# EAGLE board IOXGDv0.4.1 Panel (EAGLE 9.5.0), part 1 of 3
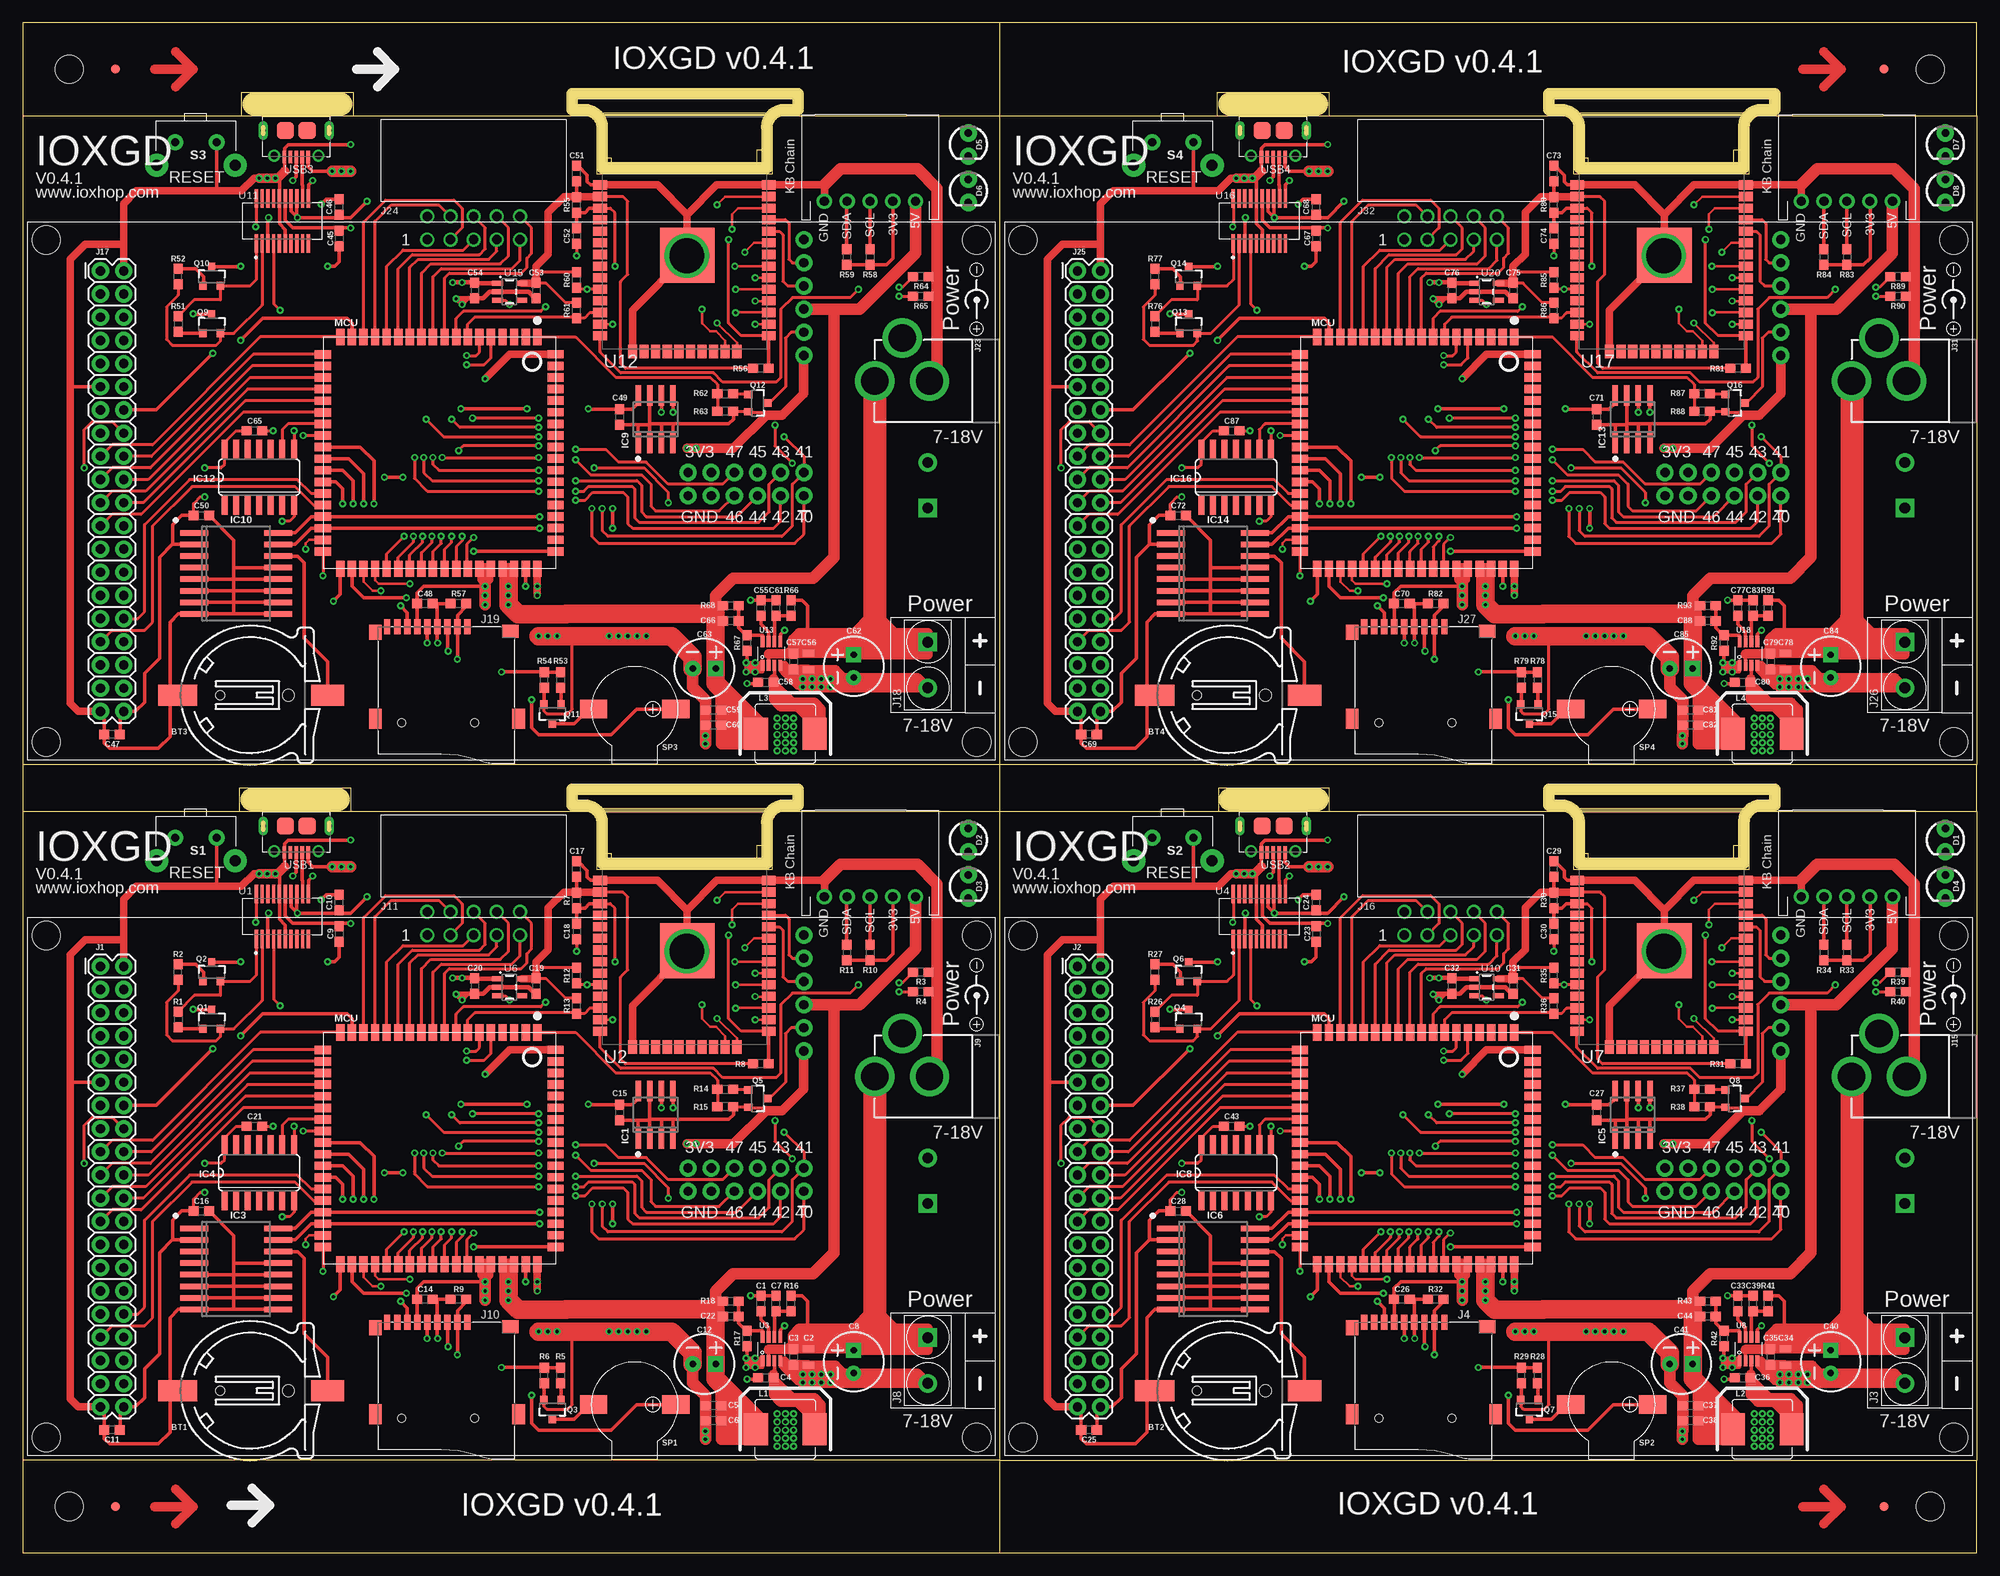
[diagram p0: board, top side]
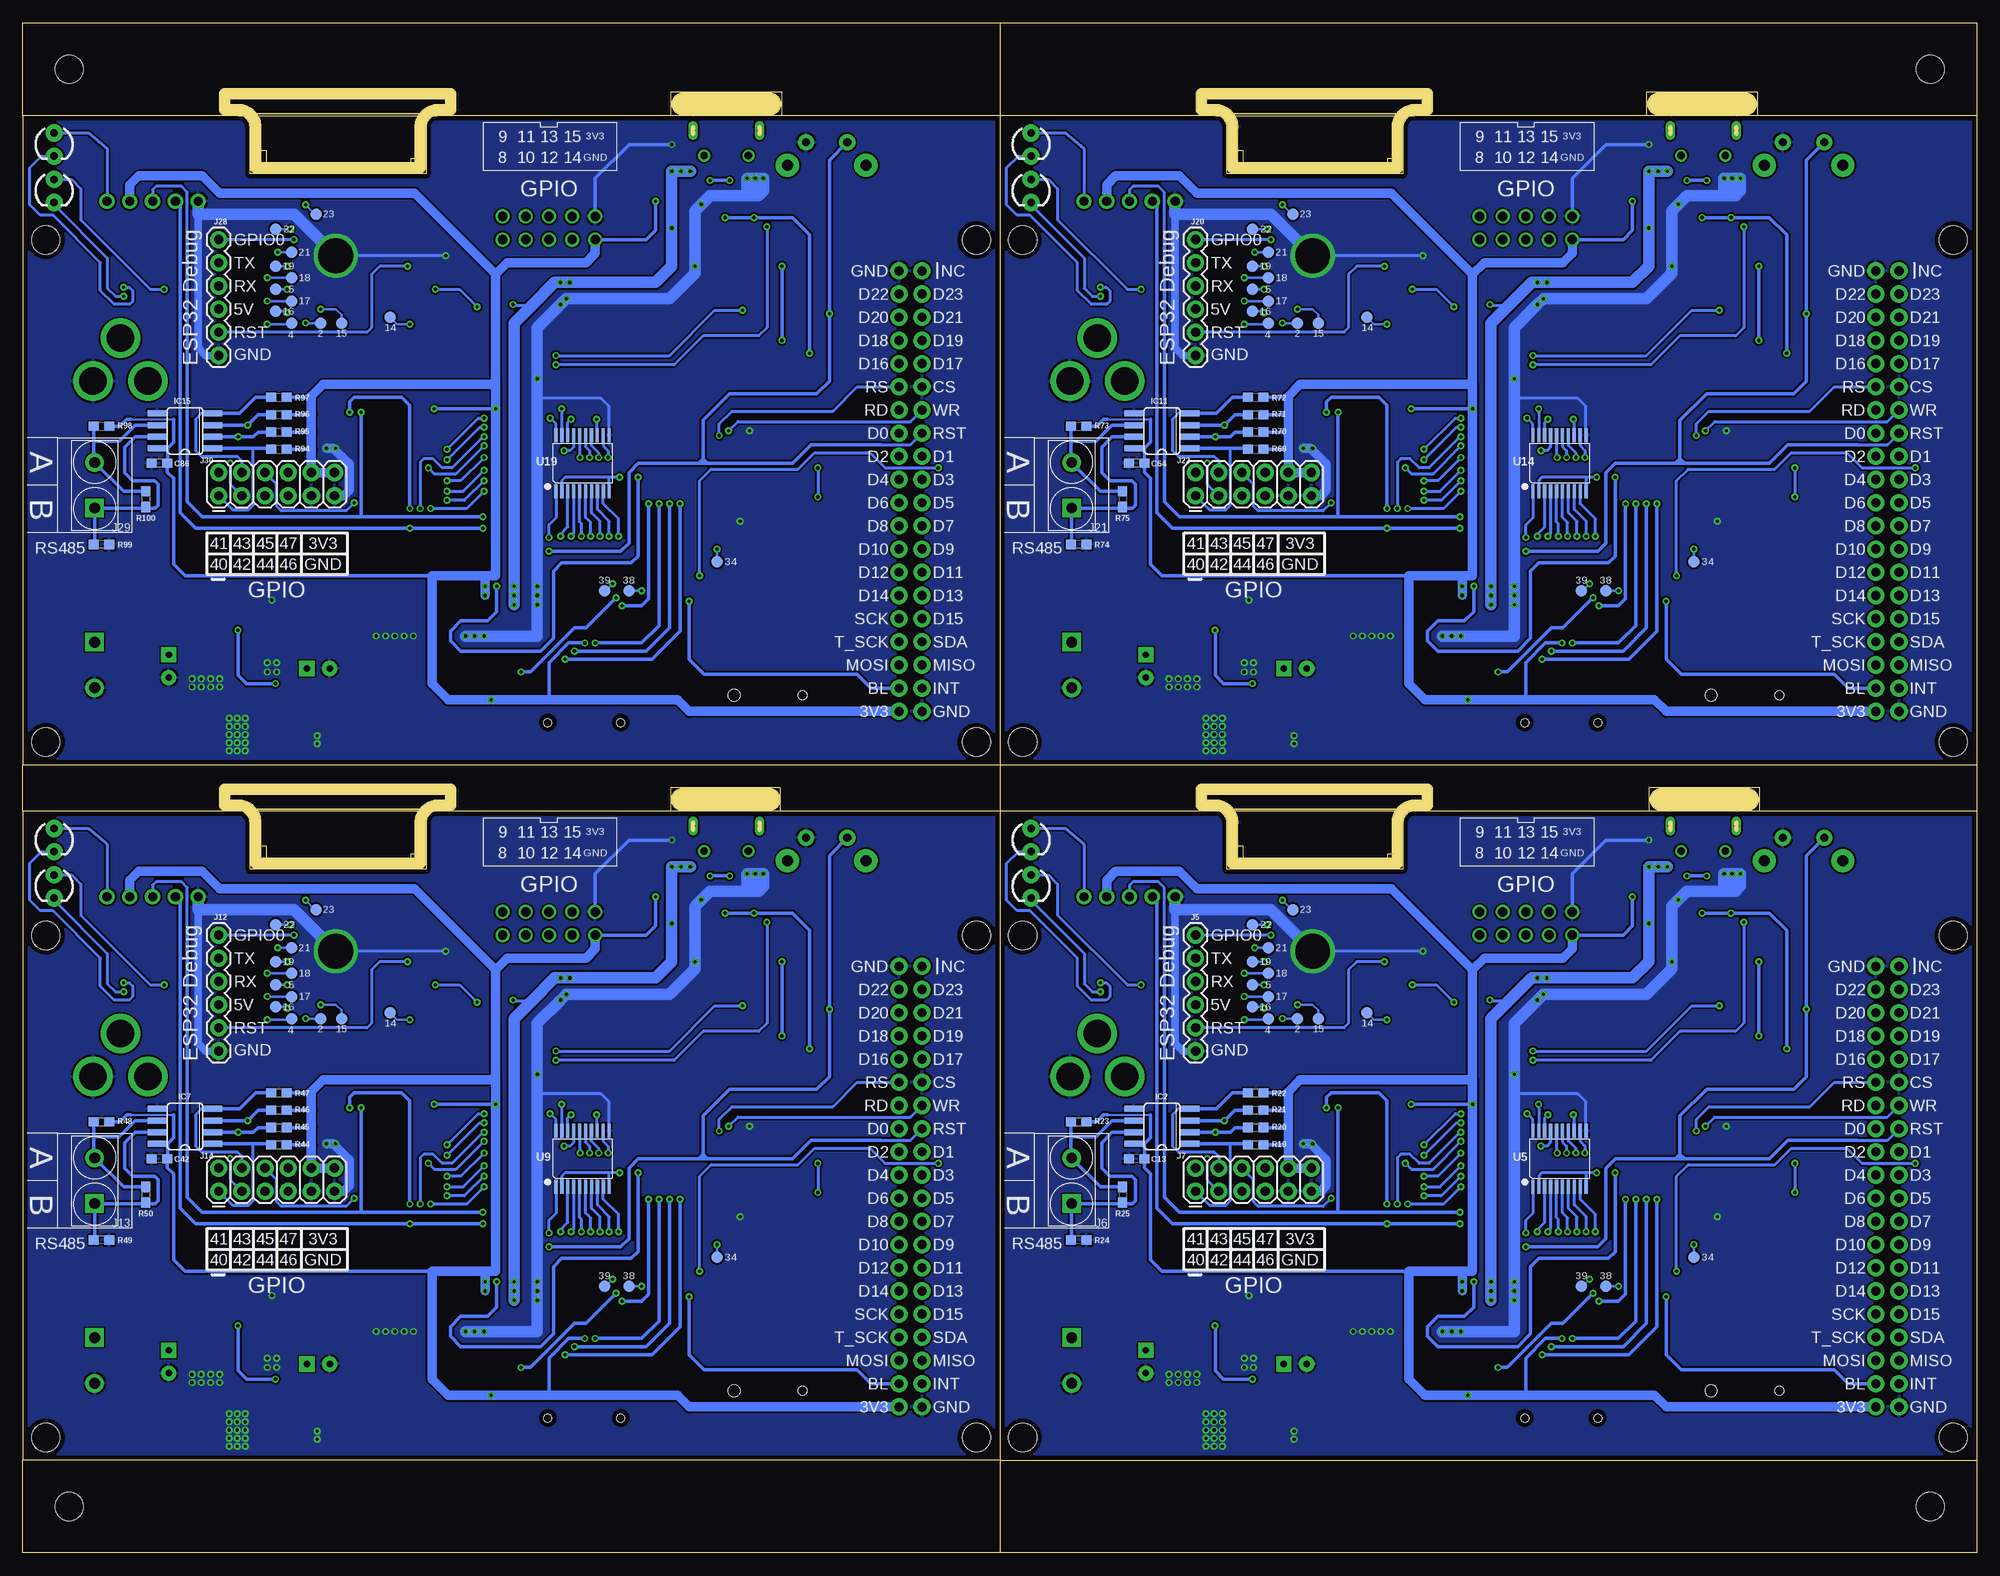
[diagram p1: board, bottom side, seen from below]

Size 214.12 x 167.64 mm. Coordinates in mm from the lower left corner, seen from the top.
Outline: 0,81.28 0,10.16
Outline: 0,81.28 23.75,81.28
Outline: 23.75,81.28 35.94,81.28
Outline: 35.94,81.28 61.6,81.28
Outline: 61.6,81.28 arc-90 62.87,80.01 62.87,74.93 82.17,74.93 82.17,80.01 arc-90 83.44,81.28
Outline: 83.44,81.28 107.06,81.28
Outline: 107.06,10.16 0,10.16
Outline: 107.06,81.28 107.06,10.16
Outline: 107.06,81.28 131.06,81.28
Outline: 131.06,81.28 143.13,81.28
Outline: 143.13,81.28 168.66,81.28
Outline: 168.66,81.28 arc-90 169.93,80.01
Outline: 189.23,80.01 arc-90 190.5,81.28
Outline: 214.12,81.28 214.12,10.16
Outline: 0,157.48 0,86.36
Outline: 0,157.48 24,157.48
Outline: 24,157.48 36.2,157.48
Outline: 36.2,157.48 61.6,157.48
Outline: 61.6,157.48 arc-90 62.87,156.21 62.87,151.13 82.17,151.13 82.17,156.21 arc-90 83.44,157.48
Outline: 83.44,157.48 107.06,157.48
Outline: 107.06,157.48 107.06,86.36
Outline: 107.06,157.48 130.94,157.48
Outline: 130.94,157.48 143.13,157.48
Outline: 143.13,157.48 168.66,157.48
Outline: 168.66,157.48 arc-90 169.93,156.21 169.93,151.13 189.23,151.13 189.23,156.21 arc-90 190.5,157.48
Outline: 190.5,157.48 214.12,157.48
Outline: 214.12,157.48 214.12,86.36
Outline: 214.12,86.36 107.06,86.36
Outline: 0,157.48 0,167.64 107.06,167.64
Outline: 0,86.36 0,81.28
Outline: 0,10.16 0,0 107.06,0
Outline: 107.06,0 214.12,0 214.12,10.16
Outline: 214.12,81.28 214.12,86.36
Outline: 214.12,157.48 214.12,167.64 107.06,167.64
Outline: 61.6,81.28 83.44,81.28
Outline: 168.66,81.28 190.5,81.28
Outline: 107.06,86.36 0,86.36
Outline: 107.06,167.64 107.06,0
Outline: 107.06,10.16 214.12,10.16
Outline: 190.5,157.48 168.66,157.48
Outline: 83.44,157.48 61.6,157.48
Outline: 168.66,81.28 arc-90 169.93,80.01
Outline: 169.93,80.01 169.93,74.93 189.23,74.93 189.23,80.01
Outline: 189.23,80.01 arc-90 190.5,81.28
Outline: 190.5,81.28 214.12,81.28
Outline: 23.75,81.28 23.75,83.82 35.94,83.82 35.94,81.28
Outline: 131.06,81.28 131.06,83.82 143.13,83.82 143.13,81.28
Outline: 130.94,157.48 130.94,160.02 143.13,160.02 143.13,157.48
Outline: 24,157.48 24,160.02 36.2,160.02 36.2,157.48
Copper layers (1*16): Top 0.035mm / dielectric 1.5mm / Bottom 0.035mm
Design rules "default *": minimum track width 6mil, minimum drill 0.35mm, track to track 8mil, track to pad 6mil, pad to pad 6mil, via to via 6mil, smd to smd 6mil, copper to edge 20mil, drill to drill 6mil, minimum pad ring 10mil, minimum via ring 8mil, stop-mask expansion 4mil, vias tented up to drill 20mil, thermal gap 10mil
Holes 3.1 mm at 104.55,67.65 104.55,12.65 2.55,12.65 2.55,67.65 211.61,67.65 211.61,12.65 109.61,12.65 109.61,67.65 104.55,143.85 104.55,88.85 2.55,88.85 2.55,143.85 211.61,143.85 211.61,88.85 109.61,88.85 109.61,143.85 209.04,5.08 5.08,5.08 5.08,162.56 209.04,162.56
Milling: area 63.1,75.2 to 81.9,81.5; area 60.2,81.4 to 85,83.8; area 62.9,74.9 to 64.5,76.6; area 80.4,74.9 to 82.2,77.5; area 170.2,75.2 to 189,81.5; area 167.3,81.4 to 192,83.8; area 169.9,74.9 to 171.6,76.6; area 187.5,74.9 to 189.2,77.5; area 63.1,151.4 to 81.9,157.7; area 60.2,157.6 to 85,160; area 62.9,151.1 to 64.5,152.8; area 80.4,151.1 to 82.2,153.7; area 170.2,151.4 to 189,157.7; area 167.3,157.6 to 192,160; area 169.9,151.1 to 171.6,152.8; area 187.5,151.1 to 189.2,153.7; 44 lines

## Footprints (pad centres in the part's own frame; a part is rotated, then mirrored left to right if it is on the bottom)
CH291-1220LF = smd 2.3 x 3.66: + 0,-2.296 | smd 2.3 x 4.3: - 0,14.146 | hole 1.3: 0,2 | hole 1: 0,9.5
0603 = smd 1.1 x 1: 1 -0.85,0; 2 0.85,0
0805 = smd 0.8 x 1.2: 1 -0.9,0; 2 0.9,0
CPOL-RADIAL-2.5MM-6.5MM = drill 0.7 pad 1.651 square: 1 1.25,0 | drill 0.7 pad 1.651: 2 -1.25,0
LED_3MM = drill 0.813 pad 1.88: A -1.27,0; K 1.27,0
FIDUCIAL-1X2 = smd 1 x 1: 1 0,0
SO-08 = smd 0.6 x 2.2: 1 -1.905,-2.6; 2 -0.635,-2.6; 3 0.635,-2.6; 4 1.905,-2.6; 5 1.905,2.6; 6 0.635,2.6; 7 -0.635,2.6; 8 -1.905,2.6
SO08 = smd 0.66 x 2.032: 1 -1.905,-3.073; 2 -0.635,-3.073; 3 0.635,-3.073; 4 1.905,-3.073; 5 1.905,3.073; 6 0.635,3.073; 7 -0.635,3.073; 8 -1.905,3.073
SO16W = smd 0.6 x 3.048: 1 -4.445,-4.6; 2 -3.175,-4.6; 3 -1.905,-4.6; 4 -0.635,-4.6; 5 0.635,-4.6; 6 1.905,-4.6; 7 3.175,-4.6; 8 4.445,-4.6; 9 4.445,4.6; 10 3.175,4.6; 11 1.905,4.6; 12 0.635,4.6; 13 -0.635,4.6; 14 -1.905,4.6; 15 -3.175,4.6; 16 -4.445,4.6
SO14 = smd 0.66 x 2.032: 1 -3.81,-3.073; 2 -2.54,-3.073; 3 -1.27,-3.073; 4 0,-3.073; 5 1.27,-3.073; 6 2.54,-3.073; 7 3.81,-3.073; 8 3.81,3.073; 9 2.54,3.073; 10 1.27,3.073; 11 0,3.073; 12 -1.27,3.073; 13 -2.54,3.073; 14 -3.81,3.073
2X20 = drill 1.016 pad 1.88: 1 0,0; 2 0,2.54; 3 2.54,0; 4 2.54,2.54; 5 5.08,0; 6 5.08,2.54; 7 7.62,0; 8 7.62,2.54; 9 10.16,0; 10 10.16,2.54; 11 12.7,0; 12 12.7,2.54; 13 15.24,0; 14 15.24,2.54; 15 17.78,0; 16 17.78,2.54; 17 20.32,0; 18 20.32,2.54; 19 22.86,0; 20 22.86,2.54; 21 25.4,0; 22 25.4,2.54; 23 27.94,0; 24 27.94,2.54; 25 30.48,0; 26 30.48,2.54; 27 33.02,0; 28 33.02,2.54; 29 35.56,0; 30 35.56,2.54; 31 38.1,0; 32 38.1,2.54; 33 40.64,0; 34 40.64,2.54; 35 43.18,0; 36 43.18,2.54; 37 45.72,0; 38 45.72,2.54; 39 48.26,0; 40 48.26,2.54
H2-5.0-10.5X8.0MM = drill 1.168 pad 2.032 square: 1 0,2.5 | drill 1.168 pad 2.032: 2 0,-2.5
MICRO-SD9+4P-SMD-16.1X14.5X1.85MM = smd 1.6 x 0.7: 1 0,2.25; 2 0,1.15; 3 0,0.05; 4 0,-1.05; 5 0,-2.15; 6 0,-3.25; 7 0,-4.35; 8 0,-5.45; 9 0,-6.55 | smd 1.6 x 1.4: G1 0.6,-7.85 | smd 2.2 x 1.4: G2 10.1,-7.85; G3 10.1,7.85 | smd 1.4 x 1.8: G4 0.5,6.95 | hole 0.9: 10.5,-4.95; 10.5,3.05
1X06 = drill 1.016 pad 1.88: 1 0,0; 2 2.54,0; 3 5.08,0; 4 7.62,0; 5 10.16,0; 6 12.7,0
2X6 = drill 1.016 pad 1.88: 1 0,0; 2 0,2.54; 3 2.54,0; 4 2.54,2.54; 5 5.08,0; 6 5.08,2.54; 7 7.62,0; 8 7.62,2.54; 9 10.16,0; 10 10.16,2.54; 11 12.7,0; 12 12.7,2.54
POWER_JACK_PTH = drill 2.997 pad 4.318: GND 0,7.7; GNDBREAK 4.7,10.7; PWR 0,13.7
612010235221 = drill 1.02: 1 5.08,1.27; 2 5.08,-1.27; 3 2.54,1.27; 4 2.54,-1.27; 5 0,1.27; 6 0,-1.27; 7 -2.54,1.27; 8 -2.54,-1.27; 9 -5.08,1.27; 10 -5.08,-1.27
MCS0630SERIES = smd 2.6 x 3.5: P$1 -3.2,-0.1; P$2 3.2,-0.1
M1 = smd 1.778 x 0.914: 1 0,0; 2 0,-1.27; 3 0,-2.54; 4 0,-3.81; 5 0,-5.08; 6 0,-6.35; 7 0,-7.62; 8 0,-8.89; 9 0,-10.16; 10 0,-11.43; 11 0,-12.7; 12 0,-13.97; 13 0,-15.24; 14 0,-16.51; 15 0,-17.78; 16 0,-19.05; 17 0,-20.32; 18 0,-21.59; 37 25.4,-21.59; 38 25.4,-20.32; 39 25.4,-19.05; 40 25.4,-17.78; 41 25.4,-16.51; 42 25.4,-15.24; 43 25.4,-13.97; 44 25.4,-12.7; 45 25.4,-11.43; 46 25.4,-10.16; 47 25.4,-8.89; 48 25.4,-7.62; 49 25.4,-6.35; 50 25.4,-5.08; 51 25.4,-3.81; 52 25.4,-2.54; 53 25.4,-1.27; 54 25.4,0 | smd 0.914 x 1.778: 19 1.91,-23.5; 20 3.18,-23.5; 21 4.45,-23.5; 22 5.72,-23.5; 23 6.99,-23.5; 24 8.26,-23.5; 25 9.53,-23.5; 26 10.8,-23.5; 27 12.07,-23.5; 28 13.34,-23.5; 29 14.61,-23.5; 30 15.88,-23.5; 31 17.15,-23.5; 32 18.42,-23.5; 33 19.69,-23.5; 34 20.96,-23.5; 35 22.23,-23.5; 36 23.5,-23.5; 55 23.49,2; 56 22.22,2; 57 20.95,2; 58 19.68,2; 59 18.41,2; 60 17.14,2; 61 15.87,2; 62 14.6,2; 63 13.33,2; 64 12.06,2; 65 10.79,2; 66 9.52,2; 67 8.25,2; 68 6.98,2; 69 5.71,2; 70 4.44,2; 71 3.17,2; 72 1.9,2
SOT23-3 = smd 0.8 x 0.9: 1 -0.95,-1; 2 0.95,-1; 3 0,1.1
TC-020X = drill 0.9 pad 1.778: 1 -2.21,0.11; 2 2.31,0.11 | drill 1.2 pad 2.54: 3 -4.25,-2.4; 4 4.35,-2.4
SMD-BUZZER1 = smd 3 x 2: + 4.5,0; - -4.5,0
PAD.03X.05 = smd 1.27 x 1.27: P$1 0,0
SOP63P599X175-20N = smd 1.97 x 0.41: 1 -2.47,2.857; 2 -2.47,2.223; 3 -2.47,1.587; 4 -2.47,0.953; 5 -2.47,0.318; 6 -2.47,-0.318; 7 -2.47,-0.953; 8 -2.47,-1.587; 9 -2.47,-2.223; 10 -2.47,-2.857; 11 2.47,-2.857; 12 2.47,-2.223; 13 2.47,-1.587; 14 2.47,-0.953; 15 2.47,-0.318; 16 2.47,0.318; 17 2.47,0.953; 18 2.47,1.587; 19 2.47,2.223; 20 2.47,2.857
ESP-WROOM-32 = smd 1.5 x 1: 1 -9.25,7; 2 -9.25,5.73; 3 -9.25,4.46; 4 -9.25,3.19; 5 -9.25,1.92; 6 -9.25,0.65; 7 -9.25,-0.62; 8 -9.25,-1.89; 9 -9.25,-3.16; 10 -9.25,-4.43; 11 -9.25,-5.7; 12 -9.25,-6.97; 13 -9.25,-8.24; 14 -9.25,-9.51; 25 9.25,-9.51; 26 9.25,-8.24; 27 9.25,-6.97; 28 9.25,-5.7; 29 9.25,-4.43; 30 9.25,-3.16; 31 9.25,-1.89; 32 9.25,-0.62; 33 9.25,0.65; 34 9.25,1.92; 35 9.25,3.19; 36 9.25,4.46; 37 9.25,5.73; 38 9.25,7 | smd 1 x 1.5: 15 -5.7,-11.25; 16 -4.43,-11.25; 17 -3.16,-11.25; 18 -1.89,-11.25; 19 -0.62,-11.25; 20 0.65,-11.25; 21 1.92,-11.25; 22 3.19,-11.25; 23 4.46,-11.25; 24 5.73,-11.25 | smd 6 x 6: GND 0.3,-0.7
TSOT-23-8 = smd 0.4 x 1.22: 1 -0.975,-1.31; 2 -0.325,-1.31; 3 0.325,-1.31; 4 0.975,-1.31; 5 0.975,1.31; 6 0.325,1.31; 7 -0.325,1.31; 8 -0.975,1.31
TSSOP20-0.65-6.5X4.4MM = smd 0.35 x 1.5: 1 -2.925,-3.065; 2 -2.275,-3.065; 3 -1.625,-3.065; 4 -0.975,-3.065; 5 -0.325,-3.065; 6 0.325,-3.065; 7 0.975,-3.065; 8 1.625,-3.065; 9 2.275,-3.065; 10 2.925,-3.065; 11 2.91,3.065; 12 2.26,3.065; 13 1.61,3.065; 14 0.96,3.065; 15 0.325,3.065; 16 -0.325,3.065; 17 -0.975,3.065; 18 -1.625,3.065; 19 -2.275,3.065; 20 -2.925,3.065
SOT23-5 = smd 0.55 x 1.2: 1 -0.95,-1.3; 2 0,-1.3; 3 0.95,-1.3; 4 0.95,1.3; 5 -0.95,1.3
JST5PIN = drill 1 pad 1.676: 1 0,5; 2 0,2.5; 3 0,0; 4 0,-2.5; 5 0,-5
MICRO-USB5+6P-SMD-0.65-AB = smd 0.4 x 1.35: 1 -1.3,2.875; 2 -0.65,2.875; 3 0,2.875; 4 0.65,2.875; 5 1.3,2.875 | smd 1.9 x 1.9: P1 -1.2,0; P2 1.2,0 | drill 0.508 pad 1.016 long: P3 -3.625,0; P4 3.625,0 | drill 0.8: P5 -2.425,2.73; P6 2.425,2.73

## Placement (x,y rotation side)
BT1  CH291-1220LF  [CH291-1220LF]  31.12,17.78 90 top
BT2  CH291-1220LF  [CH291-1220LF]  138.18,17.78 90 top
BT3  CH291-1220LF  [CH291-1220LF]  31.12,93.98 90 top
BT4  CH291-1220LF  [CH291-1220LF]  138.18,93.98 90 top
C1  0.1uF  [0603]  80.9,27.3 90 top
C2  22uF  [0805]  86.11,21.46 270 top
C3  0.1uF  [0603]  84.46,21.46 270 top
C4  0.1uF  [0603]  81.41,19.18 0 top
C5  22uF  [0603]  75.69,16.13 180 top
C6  22uF  [0603]  75.69,14.48 180 top
C7  0.1uF  [0603]  82.55,27.3 90 top
C8  100uF  [CPOL-RADIAL-2.5MM-6.5MM]  91.06,20.95 90 top
C9  0.1uF  [0603]  34.67,67.82 270 top
C10  0.1uF  [0603]  34.67,71.25 90 top
C11  0.1uF  [0603]  9.78,13.46 180 top
C12  330uF  [CPOL-RADIAL-2.5MM-6.5MM]  74.68,20.7 0 top
C13  0.1uF  [0603]  92.07,43.18 180 bottom
C14  0.1uF  [0603]  44.07,27.81 180 top
C15  0.1uF  [0603]  65.41,48.26 270 top
C16  0.1uF  [0603]  19.56,37.47 0 top
C17  0.1uF  [0603]  60.71,74.93 90 top
C18  0.1uF  [0603]  60.71,68.07 270 top
C19  0.1uF  [0603]  56.26,62.1 270 top
C20  0.1uF  [0603]  49.53,62.1 270 top
C21  0.1uF  [0603]  25.4,46.74 0 top
C22  13pF  [0603]  77.6,25.91 180 top
C23  0.1uF  [0603]  141.73,67.82 270 top
C24  0.1uF  [0603]  141.73,71.25 90 top
C25  0.1uF  [0603]  116.84,13.46 180 top
C26  0.1uF  [0603]  151.13,27.81 180 top
C27  0.1uF  [0603]  172.47,48.26 270 top
C28  0.1uF  [0603]  126.62,37.47 0 top
C29  0.1uF  [0603]  167.77,74.93 90 top
C30  0.1uF  [0603]  167.77,68.07 270 top
C31  0.1uF  [0603]  163.32,62.1 270 top
C32  0.1uF  [0603]  156.59,62.1 270 top
C33  0.1uF  [0603]  187.96,27.3 90 top
C34  22uF  [0805]  193.17,21.46 270 top
C35  0.1uF  [0603]  191.52,21.46 270 top
C36  0.1uF  [0603]  188.47,19.18 0 top
C37  22uF  [0603]  182.75,16.13 180 top
C38  22uF  [0603]  182.75,14.48 180 top
C39  0.1uF  [0603]  189.61,27.3 90 top
C40  100uF  [CPOL-RADIAL-2.5MM-6.5MM]  198.12,20.95 90 top
C41  330uF  [CPOL-RADIAL-2.5MM-6.5MM]  181.74,20.7 0 top
C42  0.1uF  [0603]  199.14,43.18 180 bottom
C43  0.1uF  [0603]  132.46,46.74 0 top
C44  13pF  [0603]  184.66,25.91 180 top
C45  0.1uF  [0603]  34.67,144.02 270 top
C46  0.1uF  [0603]  34.67,147.45 90 top
C47  0.1uF  [0603]  9.78,89.66 180 top
C48  0.1uF  [0603]  44.07,104.01 180 top
C49  0.1uF  [0603]  65.41,124.46 270 top
C50  0.1uF  [0603]  19.56,113.66 0 top
C51  0.1uF  [0603]  60.71,151.13 90 top
C52  0.1uF  [0603]  60.71,144.27 270 top
C53  0.1uF  [0603]  56.26,138.3 270 top
C54  0.1uF  [0603]  49.53,138.3 270 top
C55  0.1uF  [0603]  80.9,103.5 90 top
C56  22uF  [0805]  86.11,97.66 270 top
C57  0.1uF  [0603]  84.46,97.66 270 top
C58  0.1uF  [0603]  81.41,95.38 0 top
C59  22uF  [0603]  75.69,92.33 180 top
C60  22uF  [0603]  75.69,90.68 180 top
C61  0.1uF  [0603]  82.55,103.5 90 top
C62  100uF  [CPOL-RADIAL-2.5MM-6.5MM]  91.06,97.16 90 top
C63  330uF  [CPOL-RADIAL-2.5MM-6.5MM]  74.68,96.9 0 top
C64  0.1uF  [0603]  92.07,119.38 180 bottom
C65  0.1uF  [0603]  25.4,122.94 0 top
C66  13pF  [0603]  77.6,102.11 180 top
C67  0.1uF  [0603]  141.73,144.02 270 top
C68  0.1uF  [0603]  141.73,147.45 90 top
C69  0.1uF  [0603]  116.84,89.66 180 top
C70  0.1uF  [0603]  151.13,104.01 180 top
C71  0.1uF  [0603]  172.47,124.46 270 top
C72  0.1uF  [0603]  126.62,113.66 0 top
C73  0.1uF  [0603]  167.77,151.13 90 top
C74  0.1uF  [0603]  167.77,144.27 270 top
C75  0.1uF  [0603]  163.32,138.3 270 top
C76  0.1uF  [0603]  156.59,138.3 270 top
C77  0.1uF  [0603]  187.96,103.5 90 top
C78  22uF  [0805]  193.17,97.66 270 top
C79  0.1uF  [0603]  191.52,97.66 270 top
C80  0.1uF  [0603]  188.47,95.38 0 top
C81  22uF  [0603]  182.75,92.33 180 top
C82  22uF  [0603]  182.75,90.68 180 top
C83  0.1uF  [0603]  189.61,103.5 90 top
C84  100uF  [CPOL-RADIAL-2.5MM-6.5MM]  198.12,97.16 90 top
C85  330uF  [CPOL-RADIAL-2.5MM-6.5MM]  181.74,96.9 0 top
C86  0.1uF  [0603]  199.14,119.38 180 bottom
C87  0.1uF  [0603]  132.46,122.94 0 top
C88  13pF  [0603]  184.66,102.11 180 top
D1  [LED_3MM]  210.69,78.1 270 top
D2  [LED_3MM]  103.63,78.1 270 top
D3  [LED_3MM]  103.63,73.02 270 top
D4  [LED_3MM]  210.69,73.02 270 top
D5  [LED_3MM]  103.63,154.31 270 top
D6  [LED_3MM]  103.63,149.23 270 top
D7  [LED_3MM]  210.69,154.31 270 top
D8  [LED_3MM]  210.69,149.23 270 top
E$1  [FIDUCIAL-1X2]  10.16,162.56 0 top
E$2  [FIDUCIAL-1X2]  10.16,5.08 0 top
E$3  [FIDUCIAL-1X2]  203.96,5.08 0 top
E$4  [FIDUCIAL-1X2]  203.96,162.56 0 top
IC1  BR24G32F  [SO-08]  69.34,48.01 0 top
IC2  MAX481CSA  [SO08]  89.28,46.74 90 bottom
IC3  DS3231/SO  [SO16W]  23.37,31.11 270 top
IC4  74HC04D  [SO14]  25.91,41.66 0 top
IC5  BR24G32F  [SO-08]  176.4,48.01 0 top
IC6  DS3231/SO  [SO16W]  130.43,31.11 270 top
IC7  MAX481CSA  [SO08]  196.34,46.74 90 bottom
IC8  74HC04D  [SO14]  132.97,41.66 0 top
IC9  BR24G32F  [SO-08]  69.34,124.21 0 top
IC10  DS3231/SO  [SO16W]  23.37,107.31 270 top
IC11  MAX481CSA  [SO08]  89.28,122.94 90 bottom
IC12  74HC04D  [SO14]  25.91,117.86 0 top
IC13  BR24G32F  [SO-08]  176.4,124.21 0 top
IC14  DS3231/SO  [SO16W]  130.43,107.31 270 top
IC15  MAX481CSA  [SO08]  196.34,122.94 90 bottom
IC16  74HC04D  [SO14]  132.97,117.86 0 top
J1  LCD  [2X20]  8.51,64.26 270 top
J2  LCD  [2X20]  115.57,64.26 270 top
J3  GREEN-2P-5.0  [H2-5.0-10.5X8.0MM]  206.25,21.08 0 top
J4  MICROSD-9P  [MICRO-SD9+4P-SMD-16.1X14.5X1.85MM]  153.54,25.27 270 top
J5  [1X06]  85.6,67.69 270 bottom
J6  RS485  [H2-5.0-10.5X8.0MM]  99.19,40.77 180 bottom
J7  2X6 FEMALE  [2X6]  85.6,39.62 0 bottom
J8  GREEN-2P-5.0  [H2-5.0-10.5X8.0MM]  99.19,21.08 0 top
J9  POWER_JACK  [POWER_JACK_PTH]  107.06,52.2 90 top
J10  MICROSD-9P  [MICRO-SD9+4P-SMD-16.1X14.5X1.85MM]  46.48,25.27 270 top
J11  [612010235221]  49.4,68.96 180 top
J12  [1X06]  192.66,67.69 270 bottom
J13  RS485  [H2-5.0-10.5X8.0MM]  206.25,40.77 180 bottom
J14  2X6 FEMALE  [2X6]  192.66,39.62 0 bottom
J15  POWER_JACK  [POWER_JACK_PTH]  214.12,52.2 90 top
J16  [612010235221]  156.46,68.96 180 top
J17  LCD  [2X20]  8.51,140.46 270 top
J18  GREEN-2P-5.0  [H2-5.0-10.5X8.0MM]  99.19,97.28 0 top
J19  MICROSD-9P  [MICRO-SD9+4P-SMD-16.1X14.5X1.85MM]  46.48,101.47 270 top
J20  [1X06]  85.6,143.89 270 bottom
J21  RS485  [H2-5.0-10.5X8.0MM]  99.19,116.97 180 bottom
J22  2X6 FEMALE  [2X6]  85.6,115.82 0 bottom
J23  POWER_JACK  [POWER_JACK_PTH]  107.06,128.4 90 top
J24  [612010235221]  49.4,145.16 180 top
J25  LCD  [2X20]  115.57,140.46 270 top
J26  GREEN-2P-5.0  [H2-5.0-10.5X8.0MM]  206.25,97.28 0 top
J27  MICROSD-9P  [MICRO-SD9+4P-SMD-16.1X14.5X1.85MM]  153.54,101.47 270 top
J28  [1X06]  192.66,143.89 270 bottom
J29  RS485  [H2-5.0-10.5X8.0MM]  206.25,116.97 180 bottom
J30  2X6 FEMALE  [2X6]  192.66,115.82 0 bottom
J31  POWER_JACK  [POWER_JACK_PTH]  214.12,128.4 90 top
J32  [612010235221]  156.46,145.16 180 top
L1  6R8  [MCS0630SERIES]  83.57,13.46 180 top
L2  6R8  [MCS0630SERIES]  190.63,13.46 180 top
L3  6R8  [MCS0630SERIES]  83.57,89.66 180 top
L4  6R8  [MCS0630SERIES]  190.63,89.66 180 top
MCU1  SIPEED_M1  [M1]  56.39,57.02 270 top
MCU2  SIPEED_M1  [M1]  163.45,57.02 270 top
MCU3  SIPEED_M1  [M1]  56.39,133.22 270 top
MCU4  SIPEED_M1  [M1]  163.45,133.22 270 top
Q1  SI2302  [SOT23-3]  20.7,58.42 0 top
Q2  SI2302  [SOT23-3]  20.7,63.63 0 top
Q3  SI2302  [SOT23-3]  58.04,15.75 180 top
Q4  SI2302  [SOT23-3]  127.76,58.42 0 top
Q5  SI2302  [SOT23-3]  80.52,49.78 270 top
Q6  SI2302  [SOT23-3]  127.76,63.63 0 top
Q7  SI2302  [SOT23-3]  165.1,15.75 180 top
Q8  SI2302  [SOT23-3]  187.58,49.78 270 top
Q9  SI2302  [SOT23-3]  20.7,134.62 0 top
Q10  SI2302  [SOT23-3]  20.7,139.83 0 top
Q11  SI2302  [SOT23-3]  58.04,91.95 180 top
Q12  SI2302  [SOT23-3]  80.52,125.98 270 top
Q13  SI2302  [SOT23-3]  127.76,134.62 0 top
Q14  SI2302  [SOT23-3]  127.76,139.83 0 top
Q15  SI2302  [SOT23-3]  165.1,91.95 180 top
Q16  SI2302  [SOT23-3]  187.58,125.98 270 top
R1  10k  [0603]  17.02,58.42 270 top
R2  10k  [0603]  17.02,63.63 90 top
R3  220  [0603]  98.43,63.63 180 top
R4  220  [0603]  98.43,61.47 180 top
R5  20  [0603]  58.93,19.43 270 top
R6  100k  [0603]  57.15,19.43 90 top
R7  10k  [0603]  60.71,71.5 90 top
R8  10k  [0603]  80.9,53.59 180 top
R9  10k  [0603]  47.75,27.81 180 top
R10  10k  [0603]  92.84,65.79 270 top
R11  10k  [0603]  90.3,65.79 270 top
R12  10k  [0603]  60.71,63.25 90 top
R13  10k  [0603]  60.71,59.94 90 top
R14  20  [0603]  76.96,50.8 0 top
R15  100k  [0603]  76.96,48.9 180 top
R16  100k  [0603]  84.2,27.3 90 top
R17  13.9k  [0603]  79.38,23.5 90 top
R18  100k  [0603]  77.6,27.56 180 top
R19  10k  [0603]  78.99,44.7 0 bottom
R20  10k  [0603]  78.99,46.61 0 bottom
R21  10k  [0603]  78.99,48.51 0 bottom
R22  10k  [0603]  78.99,50.42 0 bottom
R23  20k  [0603]  98.43,47.24 0 bottom
R24  20k  [0603]  98.43,34.29 180 bottom
R25  120  [0603]  93.6,39.24 270 bottom
R26  10k  [0603]  124.08,58.42 270 top
R27  10k  [0603]  124.08,63.63 90 top
R28  20  [0603]  165.99,19.43 270 top
R29  100k  [0603]  164.21,19.43 90 top
R30  10k  [0603]  167.77,71.5 90 top
R31  10k  [0603]  187.96,53.59 180 top
R32  10k  [0603]  154.81,27.81 180 top
R33  10k  [0603]  199.9,65.79 270 top
R34  10k  [0603]  197.36,65.79 270 top
R35  10k  [0603]  167.77,63.25 90 top
R36  10k  [0603]  167.77,59.94 90 top
R37  20  [0603]  184.02,50.8 0 top
R38  100k  [0603]  184.02,48.9 180 top
R39  220  [0603]  205.49,63.63 180 top
R40  220  [0603]  205.49,61.47 180 top
R41  100k  [0603]  191.26,27.3 90 top
R42  13.9k  [0603]  186.44,23.5 90 top
R43  100k  [0603]  184.66,27.56 180 top
R44  10k  [0603]  186.05,44.7 0 bottom
R45  10k  [0603]  186.05,46.61 0 bottom
R46  10k  [0603]  186.05,48.51 0 bottom
R47  10k  [0603]  186.05,50.42 0 bottom
R48  20k  [0603]  205.49,47.24 0 bottom
R49  20k  [0603]  205.49,34.29 180 bottom
R50  120  [0603]  200.66,39.24 270 bottom
R51  10k  [0603]  17.02,134.62 270 top
R52  10k  [0603]  17.02,139.83 90 top
R53  20  [0603]  58.93,95.63 270 top
R54  100k  [0603]  57.15,95.63 90 top
R55  10k  [0603]  60.71,147.7 90 top
R56  10k  [0603]  80.9,129.79 180 top
R57  10k  [0603]  47.75,104.01 180 top
R58  10k  [0603]  92.84,141.99 270 top
R59  10k  [0603]  90.3,141.99 270 top
R60  10k  [0603]  60.71,139.45 90 top
R61  10k  [0603]  60.71,136.14 90 top
R62  20  [0603]  76.96,127 0 top
R63  100k  [0603]  76.96,125.09 180 top
R64  220  [0603]  98.43,139.83 180 top
R65  220  [0603]  98.43,137.67 180 top
R66  100k  [0603]  84.2,103.5 90 top
R67  13.9k  [0603]  79.38,99.69 90 top
R68  100k  [0603]  77.6,103.76 180 top
R69  10k  [0603]  78.99,120.9 0 bottom
R70  10k  [0603]  78.99,122.81 0 bottom
R71  10k  [0603]  78.99,124.71 0 bottom
R72  10k  [0603]  78.99,126.62 0 bottom
R73  20k  [0603]  98.43,123.44 0 bottom
R74  20k  [0603]  98.43,110.49 180 bottom
R75  120  [0603]  93.6,115.44 270 bottom
R76  10k  [0603]  124.08,134.62 270 top
R77  10k  [0603]  124.08,139.83 90 top
R78  20  [0603]  165.99,95.63 270 top
R79  100k  [0603]  164.21,95.63 90 top
R80  10k  [0603]  167.77,147.7 90 top
R81  10k  [0603]  187.96,129.79 180 top
R82  10k  [0603]  154.81,104.01 180 top
R83  10k  [0603]  199.9,141.99 270 top
R84  10k  [0603]  197.36,141.99 270 top
R85  10k  [0603]  167.77,139.45 90 top
R86  10k  [0603]  167.77,136.14 90 top
R87  20  [0603]  184.02,127 0 top
R88  100k  [0603]  184.02,125.09 180 top
R89  220  [0603]  205.49,139.83 180 top
R90  220  [0603]  205.49,137.67 180 top
R91  100k  [0603]  191.26,103.5 90 top
R92  13.9k  [0603]  186.44,99.69 90 top
R93  100k  [0603]  184.66,103.76 180 top
R94  10k  [0603]  186.05,120.9 0 bottom
R95  10k  [0603]  186.05,122.81 0 bottom
R96  10k  [0603]  186.05,124.71 0 bottom
R97  10k  [0603]  186.05,126.62 0 bottom
R98  20k  [0603]  205.49,123.44 0 bottom
R99  20k  [0603]  205.49,110.49 180 bottom
R100  120  [0603]  200.66,115.44 270 bottom
S1  RESET  [TC-020X]  18.92,78.23 0 top
S2  RESET  [TC-020X]  125.98,78.23 0 top
S3  RESET  [TC-020X]  18.92,154.43 0 top
S4  RESET  [TC-020X]  125.98,154.43 0 top
SP1  SMD-BUZZER1  [SMD-BUZZER1]  67.06,16.26 0 top
SP2  SMD-BUZZER1  [SMD-BUZZER1]  174.12,16.26 0 top
SP3  SMD-BUZZER1  [SMD-BUZZER1]  67.06,92.46 0 top
SP4  SMD-BUZZER1  [SMD-BUZZER1]  174.12,92.46 0 top
TP1  TEST-POINT3X5  [PAD.03X.05]  74.93,70.48 0 bottom
TP2  TEST-POINT3X5  [PAD.03X.05]  79.38,68.83 0 bottom
TP3  TEST-POINT3X5  [PAD.03X.05]  77.6,66.29 0 bottom
TP4  TEST-POINT3X5  [PAD.03X.05]  79.38,64.77 0 bottom
TP5  TEST-POINT3X5  [PAD.03X.05]  77.6,63.5 0 bottom
TP6  TEST-POINT3X5  [PAD.03X.05]  79.38,62.23 0 bottom
TP7  TEST-POINT3X5  [PAD.03X.05]  77.6,60.96 0 bottom
TP8  TEST-POINT3X5  [PAD.03X.05]  79.38,59.82 0 bottom
TP9  TEST-POINT3X5  [PAD.03X.05]  77.6,58.55 0 bottom
TP10  TEST-POINT3X5  [PAD.03X.05]  74.42,58.55 0 bottom
TP11  TEST-POINT3X5  [PAD.03X.05]  72.14,58.55 0 bottom
TP12  TEST-POINT3X5  [PAD.03X.05]  181.99,70.48 0 bottom
TP13  TEST-POINT3X5  [PAD.03X.05]  66.8,59.18 0 bottom
TP14  TEST-POINT3X5  [PAD.03X.05]  30.99,32.39 0 bottom
TP15  TEST-POINT3X5  [PAD.03X.05]  186.44,68.83 0 bottom
TP16  TEST-POINT3X5  [PAD.03X.05]  40.64,29.21 0 bottom
TP17  TEST-POINT3X5  [PAD.03X.05]  43.31,29.21 0 bottom
TP18  TEST-POINT3X5  [PAD.03X.05]  184.66,66.29 0 bottom
TP19  TEST-POINT3X5  [PAD.03X.05]  186.44,64.77 0 bottom
TP20  TEST-POINT3X5  [PAD.03X.05]  184.66,63.5 0 bottom
TP21  TEST-POINT3X5  [PAD.03X.05]  186.44,62.23 0 bottom
TP22  TEST-POINT3X5  [PAD.03X.05]  184.66,60.96 0 bottom
TP23  TEST-POINT3X5  [PAD.03X.05]  186.44,59.82 0 bottom
TP24  TEST-POINT3X5  [PAD.03X.05]  184.66,58.55 0 bottom
TP25  TEST-POINT3X5  [PAD.03X.05]  181.48,58.55 0 bottom
TP26  TEST-POINT3X5  [PAD.03X.05]  179.2,58.55 0 bottom
TP27  TEST-POINT3X5  [PAD.03X.05]  173.86,59.18 0 bottom
TP28  TEST-POINT3X5  [PAD.03X.05]  138.05,32.39 0 bottom
TP29  TEST-POINT3X5  [PAD.03X.05]  147.7,29.21 0 bottom
TP30  TEST-POINT3X5  [PAD.03X.05]  150.37,29.21 0 bottom
TP31  TEST-POINT3X5  [PAD.03X.05]  74.93,146.69 0 bottom
TP32  TEST-POINT3X5  [PAD.03X.05]  79.38,145.03 0 bottom
TP33  TEST-POINT3X5  [PAD.03X.05]  77.6,142.49 0 bottom
TP34  TEST-POINT3X5  [PAD.03X.05]  79.38,140.97 0 bottom
TP35  TEST-POINT3X5  [PAD.03X.05]  77.6,139.7 0 bottom
TP36  TEST-POINT3X5  [PAD.03X.05]  79.38,138.43 0 bottom
TP37  TEST-POINT3X5  [PAD.03X.05]  77.6,137.16 0 bottom
TP38  TEST-POINT3X5  [PAD.03X.05]  79.38,136.02 0 bottom
TP39  TEST-POINT3X5  [PAD.03X.05]  77.6,134.75 0 bottom
TP40  TEST-POINT3X5  [PAD.03X.05]  74.42,134.75 0 bottom
TP41  TEST-POINT3X5  [PAD.03X.05]  72.14,134.75 0 bottom
TP42  TEST-POINT3X5  [PAD.03X.05]  66.8,135.38 0 bottom
TP43  TEST-POINT3X5  [PAD.03X.05]  30.99,108.58 0 bottom
TP44  TEST-POINT3X5  [PAD.03X.05]  40.64,105.41 0 bottom
TP45  TEST-POINT3X5  [PAD.03X.05]  43.31,105.41 0 bottom
TP46  TEST-POINT3X5  [PAD.03X.05]  181.99,146.69 0 bottom
TP47  TEST-POINT3X5  [PAD.03X.05]  186.44,145.03 0 bottom
TP48  TEST-POINT3X5  [PAD.03X.05]  184.66,142.49 0 bottom
TP49  TEST-POINT3X5  [PAD.03X.05]  186.44,140.97 0 bottom
TP50  TEST-POINT3X5  [PAD.03X.05]  184.66,139.7 0 bottom
TP51  TEST-POINT3X5  [PAD.03X.05]  186.44,138.43 0 bottom
TP52  TEST-POINT3X5  [PAD.03X.05]  184.66,137.16 0 bottom
TP53  TEST-POINT3X5  [PAD.03X.05]  186.44,136.02 0 bottom
TP54  TEST-POINT3X5  [PAD.03X.05]  184.66,134.75 0 bottom
TP55  TEST-POINT3X5  [PAD.03X.05]  181.48,134.75 0 bottom
TP56  TEST-POINT3X5  [PAD.03X.05]  179.2,134.75 0 bottom
TP57  TEST-POINT3X5  [PAD.03X.05]  173.86,135.38 0 bottom
TP58  TEST-POINT3X5  [PAD.03X.05]  138.05,108.58 0 bottom
TP59  TEST-POINT3X5  [PAD.03X.05]  147.7,105.41 0 bottom
TP60  TEST-POINT3X5  [PAD.03X.05]  150.37,105.41 0 bottom
U1  FT231XS-R  [SOP63P599X175-20N]  28.45,69.72 90 top
U2  ESP-WROOM-32  [ESP-WROOM-32]  72.52,66.67 0 top
U3  MP2225GJ-Z  [TSOT-23-8]  82.04,22.35 0 top
U4  FT231XS-R  [SOP63P599X175-20N]  135.51,69.72 90 top
U5  TXS0108E  [TSSOP20-0.65-6.5X4.4MM]  45.72,43.18 0 bottom
U6  3.3V  [SOT23-5]  53.34,61.98 270 top
U7  ESP-WROOM-32  [ESP-WROOM-32]  179.58,66.67 0 top
U8  MP2225GJ-Z  [TSOT-23-8]  189.1,22.35 0 top
U9  TXS0108E  [TSSOP20-0.65-6.5X4.4MM]  152.78,43.18 0 bottom
U10  3.3V  [SOT23-5]  160.4,61.98 270 top
U11  FT231XS-R  [SOP63P599X175-20N]  28.45,145.92 90 top
U12  ESP-WROOM-32  [ESP-WROOM-32]  72.52,142.88 0 top
U13  MP2225GJ-Z  [TSOT-23-8]  82.04,98.55 0 top
U14  TXS0108E  [TSSOP20-0.65-6.5X4.4MM]  45.72,119.38 0 bottom
U15  3.3V  [SOT23-5]  53.34,138.18 270 top
U16  FT231XS-R  [SOP63P599X175-20N]  135.51,145.92 90 top
U17  ESP-WROOM-32  [ESP-WROOM-32]  179.58,142.88 0 top
U18  MP2225GJ-Z  [TSOT-23-8]  189.1,98.55 0 top
U19  TXS0108E  [TSSOP20-0.65-6.5X4.4MM]  152.78,119.38 0 bottom
U20  3.3V  [SOT23-5]  160.4,138.18 270 top
U$1  KB_CHAIN-H  [JST5PIN]  199.9,71.88 90 top
U$2  KB_CHAIN-H  [JST5PIN]  92.84,71.88 90 top
U$3  KB_CHAIN-H  [JST5PIN]  92.84,148.08 90 top
U$4  KB_CHAIN-H  [JST5PIN]  199.9,148.08 90 top
USB1  ZX62-B-5PA  [MICRO-USB5+6P-SMD-0.65-AB]  29.97,79.63 180 top
USB2  ZX62-B-5PA  [MICRO-USB5+6P-SMD-0.65-AB]  137.03,79.63 180 top
USB3  ZX62-B-5PA  [MICRO-USB5+6P-SMD-0.65-AB]  29.97,155.83 180 top
USB4  ZX62-B-5PA  [MICRO-USB5+6P-SMD-0.65-AB]  137.03,155.83 180 top

## Library data of the parts
BT1-BT4 = battery
C1 C3-C7 C9-C11 C13-C33 C35-C39 C42-C55 C57-C61 C64-C77 C79-C83 C86-C88 = SparkFun-Capacitors; PROD_ID: CAP-00810
C2 C34 C56 C78 = SparkFun-Capacitors; PROD_ID: CAP-08402
C8 C12 C40 C41 C62 C63 C84 C85 = SparkFun-Capacitors; PROD_ID: CAP-08439
D1-D8 = SparkFun-LED; PROD_ID: DIO-08794
E$1-E$4 = SparkFun-Aesthetics
IC1 IC5 IC9 IC13 = microchip; MF: MICROCHIP; MPN: 24AA01/SN; OC_FARNELL: 1331268; OC_NEWARK: 89C9792
IC2 IC7 IC11 IC15 = maxim; MF: MAXIM; MPN: MAX481CSA; OC_FARNELL: unknown; OC_NEWARK: 90C3817
IC3 IC6 IC10 IC14 = DS3231; AVAILABILITY: Unavailable; MF: Maxim Integrated; MP: DS3231; PACKAGE: SOIC-16 Maxim Integrated; PRICE: None
IC4 IC8 IC12 IC16 = 74xx-eu
J1 J2 J5 J12 J17 J20 J25 J28 TP1-TP60 = SparkFun-Connectors
J3 J4 J6 J8 J10 J13 J18 J19 J21 J26 J27 J29 = OPL_Connector
J7 J14 J22 J30 = SparkFun-Connectors; PROD_ID: CONN-12423
J9 J15 J23 J31 = SparkFun-Connectors; PROD_ID: CONN-08197
J11 J16 J24 J32 = Wurth_Elektronik_Electromechanic_Wire_to_Board_Connectors_rev19a
L1-L4 = IOXhop-Inductors
MCU1-MCU4 = SiPEED
Q1-Q16 = SparkFun-DiscreteSemi; PROD_ID: TRANS-08049
R1 R2 R5-R22 R26-R38 R41-R47 R51-R63 R66-R72 R76-R88 R91-R97 = SparkFun-Resistors; PROD_ID: RES-00824
R3 R4 R39 R40 R64 R65 R89 R90 = SparkFun-Resistors; PROD_ID: RES-07861
R23 R24 R48 R49 R73 R74 R98 R99 = SparkFun-Resistors; PROD_ID: RES-09383
R25 R50 R75 R100 = SparkFun-Resistors; PROD_ID: RES-12438
S1-S4 = IOXhop Switch
SP1-SP4 = IOXhop-Buzzer
U1 U4 U11 U16 = FT231XS-R; DESCRIPTION: USB Full Speed to Full Handshake UART with USB Charger Detection; DIGI-KEY_PART_NUMBER: 768-1129-1-ND; DIGI-KEY_PURCHASE_URL: https://www.digikey.co.th/product-detail/en/ftdi-future-technology-devices-international-ltd/FT231XS-R/768-1129-1-ND/3029151?utm_source=snapeda&utm_medium=aggregator&utm_campaign=symbol; MF: FTDI,; MP: FT231XS-R; PACKAGE: SSOP-20 FTDI
U2 U7 U12 U17 = esp322
U3 U8 U13 U18 = IOXhop-IC-Power; APPLICATIONS: Overvoltage, Undervoltage Protection; CATEGORY: Integrated Circuits (ICs); CURRENT-SUPPLY: 125uA; DESCRIPTION: IC OVERVOLTAGE PROT TSOT23-8; DOCUMENTATION_LINK: <a href="http://cds.linear.com/docs/en/datasheet/4365fa.pdf">Datasheet</a>; DOCUMENTATION_URL: http://cds.linear.com/docs/en/datasheet/4365fa.pdf; FAMILY: PMIC - Power Management - Specialized; MANUFACTURER: Linear Technology; MOUNTING_TYPE: Surface Mount; OPERATING_TEMPERATURE: 0C ~ 70C; PACKAGE-CASE: SOT-23-8 Thin, TSOT-23-8; PART_NUMBER: LTC4365CTS8#TRMPBF; SERIES: -; SUPPLIER_DEVICE_PACKAGE: SOT-23-8; SUPPLIER_ITEM_INFO: http://www.digikey.com/product-detail/en/LTC4365CTS8%23TRMPBF/LTC4365CTS8%23TRMPBFCT-ND/2404677; SUPPLIER_ITEM_LINK: <a href="http://www.digikey.com/product-detail/en/LTC4365CTS8%23TRMPBF/LTC4365CTS8%23TRMPBFCT-ND/2404677">Details</a>; SUPPLIER_ITEM_NUMBER: LTC4365CTS8#TRMPBFCT-ND; SUPPLIER_ITEM_URL: http://www.digikey.com/product-detail/en/LTC4365CTS8%23TRMPBF/LTC4365CTS8%23TRMPBFCT-ND/2404677; SUPPLIER_LINK: <a href="http://www.digikey.com">Home Page</a>; SUPPLIER_NAME: Digi-Key; SUPPLIER_URL: http://www.digikey.com; VOLTAGE-SUPPLY: 2.5V ~ 34V
U5 U9 U14 U19 = Seeed-IC; MPN: TXS0108EPWR
U6 U10 U15 U20 = SparkFun-IC-Power; PROD_ID: VREG-12457
U$1-U$4 = IOXhop Connector
USB1-USB4 = OPL_Connector; MPN: ZX62-B-5PA

## Nets
1.8V: MCU1.53 U5.2 U5.10
1.8V1: MCU2.53 U9.2 U9.10
1.8V2: MCU3.53 U14.2 U14.10
1.8V3: MCU4.53 U19.2 U19.10
+3V1: C24.1 C25.1 C26.1 C27.1 C28.1 C42.1 C43.1 IC5.8 IC6.2 IC7.8 IC8.14 J2.14 J2.40 J4.4 J14.10 J14.12 J16.1 MCU2.54 R32.2 R33.2 R34.2 R44.2 R45.2 R46.2 R47.2 R48.2 SP2.+ U4.3 U4.13 U4.14 U9.19 U$1.4
+3V2: C46.1 C47.1 C48.1 C49.1 C50.1 C64.1 C65.1 IC9.8 IC10.2 IC11.8 IC12.14 J17.14 J17.40 J19.4 J22.10 J22.12 J24.1 MCU3.54 R57.2 R58.2 R59.2 R69.2 R70.2 R71.2 R72.2 R73.2 SP3.+ U11.3 U11.13 U11.14 U14.19 U$3.4
+3V3: C10.1 C11.1 C13.1 C14.1 C15.1 C16.1 C21.1 IC1.8 IC2.8 IC3.2 IC4.14 J1.14 J1.40 J7.10 J7.12 J10.4 J11.1 MCU1.54 R9.2 R10.2 R11.2 R19.2 R20.2 R21.2 R22.2 R23.2 SP1.+ U1.3 U1.13 U1.14 U5.19 U$2.4
+3V4: C68.1 C69.1 C70.1 C71.1 C72.1 C86.1 C87.1 IC13.8 IC14.2 IC15.8 IC16.14 J25.14 J25.40 J27.4 J30.10 J30.12 J32.1 MCU4.54 R82.2 R83.2 R84.2 R94.2 R95.2 R96.2 R97.2 R98.2 SP4.+ U16.3 U16.13 U16.14 U19.19 U$4.4
+5V: C5.1 C6.1 C9.1 C12.1 C20.1 C22.2 D2.A J5.4 L1.P$2 MCU1.51 MCU1.52 R18.2 U1.15 U6.1 U6.3 U$2.5 USB1.1
+5V1: C23.1 C32.1 C37.1 C38.1 C41.1 C44.2 D1.A J12.4 L2.P$2 MCU2.51 MCU2.52 R43.2 U4.15 U10.1 U10.3 U$1.5 USB2.1
+5V2: C45.1 C54.1 C59.1 C60.1 C63.1 C66.2 D5.A J20.4 L3.P$2 MCU3.51 MCU3.52 R68.2 U11.15 U15.1 U15.3 U$3.5 USB3.1
+5V3: C67.1 C76.1 C81.1 C82.1 C85.1 C88.2 D7.A J28.4 L4.P$2 MCU4.51 MCU4.52 R93.2 U16.15 U20.1 U20.3 U$4.5 USB4.1
A: IC2.6 J6.2 R23.1 R25.1
A1: IC7.6 J13.2 R48.1 R50.1
A2: IC11.6 J21.2 R73.1 R75.1
A3: IC15.6 J29.2 R98.1 R100.1
B: IC2.7 J6.1 R24.2 R25.2
B1: IC7.7 J13.1 R49.2 R50.2
B2: IC11.7 J21.1 R74.2 R75.2
B3: IC15.7 J29.1 R99.2 R100.2
BOOT: MCU1.17 Q2.3
BOOT1: MCU2.17 Q6.3
BOOT2: MCU3.17 Q10.3
BOOT3: MCU4.17 Q14.3
BUZZER: MCU1.38 R5.1 R6.2
BUZZER1: MCU2.38 R28.1 R29.2
BUZZER2: MCU3.38 R53.1 R54.2
BUZZER3: MCU4.38 R78.1 R79.2
DTR#: Q2.2 R1.1 U1.1
DTR#1: Q6.2 R26.1 U4.1
DTR#2: Q10.2 R51.1 U11.1
DTR#3: Q14.2 R76.1 U16.1
ESP32_GPIO0: J5.1 R8.1 U2.25
ESP32_GPIO1: J12.1 R31.1 U7.25
ESP32_GPIO2: TP10.P$1 U2.24
ESP32_GPIO3: D4.A U7.14
ESP32_GPIO4: TP9.P$1 U2.26
ESP32_GPIO5: TP6.P$1 U2.29
ESP32_GPIO6: TP12.P$1 U7.37
ESP32_GPIO7: TP15.P$1 U7.36
ESP32_GPIO8: TP19.P$1 U7.31
ESP32_GPIO9: TP18.P$1 U7.33
ESP32_GPIO10: TP20.P$1 U7.30
ESP32_GPIO11: TP21.P$1 U7.29
ESP32_GPIO12: D3.A U2.14
ESP32_GPIO13: TP22.P$1 U7.28
ESP32_GPIO14: TP13.P$1 U2.13
ESP32_GPIO15: TP11.P$1 U2.23
ESP32_GPIO16: TP8.P$1 U2.27
ESP32_GPIO17: TP7.P$1 U2.28
ESP32_GPIO18: TP5.P$1 U2.30
ESP32_GPIO19: TP4.P$1 U2.31
ESP32_GPIO20: TP23.P$1 U7.27
ESP32_GPIO21: TP3.P$1 U2.33
ESP32_GPIO22: TP2.P$1 U2.36
ESP32_GPIO23: TP1.P$1 U2.37
ESP32_GPIO24: TP24.P$1 U7.26
ESP32_GPIO25: TP25.P$1 U7.24
ESP32_GPIO26: TP26.P$1 U7.23
ESP32_GPIO27: TP27.P$1 U7.13
ESP32_GPIO28: J20.1 R56.1 U12.25
ESP32_GPIO29: D6.A U12.14
ESP32_GPIO30: TP31.P$1 U12.37
ESP32_GPIO31: TP32.P$1 U12.36
ESP32_GPIO32: TP34.P$1 U12.31
ESP32_GPIO33: TP33.P$1 U12.33
ESP32_GPIO34: TP35.P$1 U12.30
ESP32_GPIO35: TP36.P$1 U12.29
ESP32_GPIO36: TP37.P$1 U12.28
ESP32_GPIO37: TP38.P$1 U12.27
ESP32_GPIO38: TP39.P$1 U12.26
ESP32_GPIO39: TP40.P$1 U12.24
ESP32_GPIO40: TP41.P$1 U12.23
ESP32_GPIO41: TP42.P$1 U12.13
ESP32_GPIO42: J28.1 R81.1 U17.25
ESP32_GPIO43: D8.A U17.14
ESP32_GPIO44: TP46.P$1 U17.37
ESP32_GPIO45: TP47.P$1 U17.36
ESP32_GPIO46: TP49.P$1 U17.31
ESP32_GPIO47: TP48.P$1 U17.33
ESP32_GPIO48: TP50.P$1 U17.30
ESP32_GPIO49: TP51.P$1 U17.29
ESP32_GPIO50: TP52.P$1 U17.28
ESP32_GPIO51: TP53.P$1 U17.27
ESP32_GPIO52: TP54.P$1 U17.26
ESP32_GPIO53: TP55.P$1 U17.24
ESP32_GPIO54: TP56.P$1 U17.23
ESP32_GPIO55: TP57.P$1 U17.13
ESP32_RESET: MCU1.1 R14.1 R15.2
ESP32_RESET1: MCU2.1 R37.1 R38.2
ESP32_RESET2: MCU3.1 R62.1 R63.2
ESP32_RESET3: MCU4.1 R87.1 R88.2
ESP32_RST: C18.1 J5.5 Q5.3 R7.1 U2.3
ESP32_RST1: C30.1 J12.5 Q8.3 R30.1 U7.3
ESP32_RST2: C52.1 J20.5 Q12.3 R55.1 U12.3
ESP32_RST3: C74.1 J28.5 Q16.3 R80.1 U17.3
ESP32_RX: J5.3 U2.34
ESP32_RX1: J12.3 U7.34
ESP32_RX2: J20.3 U12.34
ESP32_RX3: J28.3 U17.34
ESP32_TX: J5.2 U2.35
ESP32_TX1: J12.2 U7.35
ESP32_TX2: J20.2 U12.35
ESP32_TX3: J28.2 U17.35
GND: BT1.- C1.2 C2.2 C3.2 C5.2 C6.2 C7.2 C8.2 C9.2 C10.2 C11.2 C12.2 C13.2 C14.2 C15.2 C16.2 C17.2 C18.2 C19.2 C20.2 C21.2 IC1.1 IC1.2 IC1.3 IC1.4 IC1.7 IC2.5 IC3.5 IC3.6 IC3.7 IC3.8 IC3.9 IC3.10 IC3.11 IC3.12 IC3.13 IC4.7 J1.2 J1.11 J1.39 J5.6 J7.9 J7.11 J8.2 J9.GND J10.6 J11.2 MCU1.49 MCU1.50 MCU1.72 Q3.2 Q5.2 R3.1 R4.1 R6.1 R15.1 R17.1 R24.1 S1.2 U1.6 U1.16 U2.1 U2.15 U2.38 U2.GND U3.1 U3.4 U5.11 U6.2 U$2.1 USB1.5
GND1: BT2.- C23.2 C24.2 C25.2 C26.2 C27.2 C28.2 C29.2 C30.2 C31.2 C32.2 C33.2 C34.2 C35.2 C37.2 C38.2 C39.2 C40.2 C41.2 C42.2 C43.2 IC5.1 IC5.2 IC5.3 IC5.4 IC5.7 IC6.5 IC6.6 IC6.7 IC6.8 IC6.9 IC6.10 IC6.11 IC6.12 IC6.13 IC7.5 IC8.7 J2.2 J2.11 J2.39 J3.2 J4.6 J12.6 J14.9 J14.11 J15.GND J16.2 MCU2.49 MCU2.50 MCU2.72 Q7.2 Q8.2 R29.1 R38.1 R39.1 R40.1 R42.1 R49.1 S2.2 U4.6 U4.16 U7.1 U7.15 U7.38 U7.GND U8.1 U8.4 U9.11 U10.2 U$1.1 USB2.5
GND2: BT3.- C45.2 C46.2 C47.2 C48.2 C49.2 C50.2 C51.2 C52.2 C53.2 C54.2 C55.2 C56.2 C57.2 C59.2 C60.2 C61.2 C62.2 C63.2 C64.2 C65.2 IC9.1 IC9.2 IC9.3 IC9.4 IC9.7 IC10.5 IC10.6 IC10.7 IC10.8 IC10.9 IC10.10 IC10.11 IC10.12 IC10.13 IC11.5 IC12.7 J17.2 J17.11 J17.39 J18.2 J19.6 J20.6 J22.9 J22.11 J23.GND J24.2 MCU3.49 MCU3.50 MCU3.72 Q11.2 Q12.2 R54.1 R63.1 R64.1 R65.1 R67.1 R74.1 S3.2 U11.6 U11.16 U12.1 U12.15 U12.38 U12.GND U13.1 U13.4 U14.11 U15.2 U$3.1 USB3.5
GND3: BT4.- C67.2 C68.2 C69.2 C70.2 C71.2 C72.2 C73.2 C74.2 C75.2 C76.2 C77.2 C78.2 C79.2 C81.2 C82.2 C83.2 C84.2 C85.2 C86.2 C87.2 IC13.1 IC13.2 IC13.3 IC13.4 IC13.7 IC14.5 IC14.6 IC14.7 IC14.8 IC14.9 IC14.10 IC14.11 IC14.12 IC14.13 IC15.5 IC16.7 J25.2 J25.11 J25.39 J26.2 J27.6 J28.6 J30.9 J30.11 J31.GND J32.2 MCU4.49 MCU4.50 MCU4.72 Q15.2 Q16.2 R79.1 R88.1 R89.1 R90.1 R92.1 R99.1 S4.2 U16.6 U16.16 U17.1 U17.15 U17.38 U17.GND U18.1 U18.4 U19.11 U20.2 U$4.1 USB4.5
I2C0_SCL: J1.32 MCU1.31
I2C0_SCL1: J2.32 MCU2.31
I2C0_SCL2: J17.32 MCU3.31
I2C0_SCL3: J25.32 MCU4.31
I2C0_SDA: J1.33 MCU1.32
I2C0_SDA1: J2.33 MCU2.32
I2C0_SDA2: J17.33 MCU3.32
I2C0_SDA3: J25.33 MCU4.32
I2C1_SCL: IC1.6 IC3.16 MCU1.33 R10.1 U$2.3
I2C1_SCL1: IC5.6 IC6.16 MCU2.33 R33.1 U$1.3
I2C1_SCL2: IC9.6 IC10.16 MCU3.33 R58.1 U$3.3
I2C1_SCL3: IC13.6 IC14.16 MCU4.33 R83.1 U$4.3
I2C1_SDA: IC1.5 IC3.15 MCU1.34 R11.1 U$2.2
I2C1_SDA1: IC5.5 IC6.15 MCU2.34 R34.1 U$1.2
I2C1_SDA2: IC9.5 IC10.15 MCU3.34 R59.1 U$3.2
I2C1_SDA3: IC13.5 IC14.15 MCU4.34 R84.1 U$4.2
IO1: J16.10 MCU2.9
IO2: J16.9 MCU2.10
IO3: J16.8 MCU2.11
IO4: J16.7 MCU2.12
IO5: J16.6 MCU2.13
IO6: J16.5 MCU2.14
IO7: J16.4 MCU2.15
IO8: J11.10 MCU1.9
IO9: J11.9 MCU1.10
IO10: J11.8 MCU1.11
IO11: J11.7 MCU1.12
IO12: J11.6 MCU1.13
IO13: J11.5 MCU1.14
IO14: J11.4 MCU1.15
IO15: J11.3 MCU1.16
IO16: J16.3 MCU2.16
IO17: IC7.1 J14.1 R44.1 U9.12
IO18: IC7.2 J14.2 R45.1 U9.13
IO19: IC7.3 J14.3 R46.1 U9.14
IO20: IC7.4 J14.4 R47.1 U9.15
IO21: J14.5 U9.16
IO22: J14.6 U9.17
IO23: J14.7 U9.18
IO24: IC4.9 MCU1.25
IO25: J14.8 U9.20
IO26: IC8.9 MCU2.25
IO27: J24.10 MCU3.9
IO28: J24.9 MCU3.10
IO29: J24.8 MCU3.11
IO30: J24.7 MCU3.12
IO31: J24.6 MCU3.13
IO32: J24.5 MCU3.14
IO33: J24.4 MCU3.15
IO34: J24.3 MCU3.16
IO35: IC11.1 J22.1 R69.1 U14.12
IO36: IC11.2 J22.2 R70.1 U14.13
IO37: IC11.3 J22.3 R71.1 U14.14
IO38: IC11.4 J22.4 R72.1 U14.15
IO39: J22.5 U14.16
IO40: IC2.1 J7.1 R19.1 U5.12
IO41: IC2.2 J7.2 R20.1 U5.13
IO42: IC2.3 J7.3 R21.1 U5.14
IO43: IC2.4 J7.4 R22.1 U5.15
IO44: J7.5 U5.16
IO45: J7.6 U5.17
IO46: J7.7 U5.18
IO47: J7.8 U5.20
IO48: J22.6 U14.17
IO49: J22.7 U14.18
IO50: J22.8 U14.20
IO51: IC12.9 MCU3.25
IO52: J32.10 MCU4.9
IO53: J32.9 MCU4.10
IO54: J32.8 MCU4.11
IO55: J32.7 MCU4.12
IO56: J32.6 MCU4.13
IO57: J32.5 MCU4.14
IO58: J32.4 MCU4.15
IO59: J32.3 MCU4.16
IO60: IC15.1 J30.1 R94.1 U19.12
IO61: IC15.2 J30.2 R95.1 U19.13
IO62: IC15.3 J30.3 R96.1 U19.14
IO63: IC15.4 J30.4 R97.1 U19.15
IO64: J30.5 U19.16
IO65: J30.6 U19.17
IO66: J30.7 U19.18
IO67: J30.8 U19.20
IO68: IC16.9 MCU4.25
IOA1: MCU2.41 U9.9
IOA2: MCU2.42 U9.8
IOA3: MCU2.43 U9.7
IOA4: MCU2.44 U9.6
IOA5: MCU2.45 U9.5
IOA6: MCU2.46 U9.4
IOA7: MCU2.47 U9.3
IOA8: MCU2.48 U9.1
IOA9: MCU2.39 TP29.P$1
IOA10: MCU2.40 TP30.P$1
IOA11: MCU3.41 U14.9
IOA12: MCU3.42 U14.8
IOA13: MCU3.43 U14.7
IOA14: MCU3.44 U14.6
IOA15: MCU3.45 U14.5
IOA16: MCU3.46 U14.4
IOA17: MCU3.47 U14.3
IOA18: MCU3.48 U14.1
IOA19: MCU3.39 TP44.P$1
IOA20: MCU3.40 TP45.P$1
IOA21: MCU4.41 U19.9
IOA22: MCU4.42 U19.8
IOA23: MCU4.43 U19.7
IOA24: MCU4.44 U19.6
IOA25: MCU4.45 U19.5
IOA26: MCU4.46 U19.4
IOA27: MCU4.47 U19.3
IOA28: MCU4.48 U19.1
IOA29: MCU4.39 TP59.P$1
IOA30: MCU4.40 TP60.P$1
IOA38: MCU1.39 TP16.P$1
IOA39: MCU1.40 TP17.P$1
IOA40: MCU1.41 U5.9
IOA41: MCU1.42 U5.8
IOA42: MCU1.43 U5.7
IOA43: MCU1.44 U5.6
IOA44: MCU1.45 U5.5
IOA45: MCU1.46 U5.4
IOA46: MCU1.47 U5.3
IOA47: MCU1.48 U5.1
ISP_RX: MCU1.5 U1.20
ISP_RX1: MCU2.5 U4.20
ISP_RX2: MCU3.5 U11.20
ISP_RX3: MCU4.5 U16.20
ISP_TX: MCU1.6 U1.4
ISP_TX1: MCU2.6 U4.4
ISP_TX2: MCU3.6 U11.4
ISP_TX3: MCU4.6 U16.4
LCD_BL: J1.38 MCU1.37
LCD_BL1: J2.38 MCU2.37
LCD_BL2: J17.38 MCU3.37
LCD_BL3: J25.38 MCU4.37
LCD_D0: J1.16 MCU1.36
LCD_D1: J1.17 MCU1.18
LCD_D2: J1.18 MCU1.19
LCD_D3: J1.19 MCU1.20
LCD_D4: J1.20 MCU1.21
LCD_D5: J1.21 MCU1.22
LCD_D6: J1.22 MCU1.23
LCD_D7: J1.23 MCU1.24
LCD_D8: J2.17 MCU2.18
LCD_D9: J2.18 MCU2.19
LCD_D10: J2.19 MCU2.20
LCD_D11: J2.20 MCU2.21
LCD_D12: J2.21 MCU2.22
LCD_D13: J2.22 MCU2.23
LCD_D14: J2.23 MCU2.24
LCD_D15: J2.16 MCU2.36
LCD_D16: J17.17 MCU3.18
LCD_D17: J17.18 MCU3.19
LCD_D18: J17.19 MCU3.20
LCD_D19: J17.20 MCU3.21
LCD_D20: J17.21 MCU3.22
LCD_D21: J17.22 MCU3.23
LCD_D22: J17.23 MCU3.24
LCD_D23: J17.16 MCU3.36
LCD_D24: J25.17 MCU4.18
LCD_D25: J25.18 MCU4.19
LCD_D26: J25.19 MCU4.20
LCD_D27: J25.20 MCU4.21
LCD_D28: J25.21 MCU4.22
LCD_D29: J25.22 MCU4.23
LCD_D30: J25.23 MCU4.24
LCD_D31: J25.16 MCU4.36
LCD_RS: J1.12 MCU1.26
LCD_RS1: J2.12 MCU2.26
LCD_RS2: J17.12 MCU3.26
LCD_RS3: J25.12 MCU4.26
LCD_WR: IC4.8 J1.13
LCD_WR1: IC8.8 J2.13
LCD_WR2: IC12.8 J17.13
LCD_WR3: IC16.8 J25.13
N$1: U1.11 USB1.3
N$2: U1.12 USB1.2
N$3: Q2.1 R2.2
N$4: Q1.1 R1.2
N$5: BT1.+ IC3.14
N$6: C1.1 U3.7
N$7: D2.K R3.2
N$8: D3.K R4.2
N$9: U4.11 USB2.3
N$10: Q3.3 SP1.-
N$11: Q3.1 R5.2
N$12: C4.1 U3.5
N$13: C4.2 L1.P$1 U3.3
N$14: C22.1 R17.2 R18.1 U3.8
N$15: Q5.1 R14.2
N$16: U4.12 USB2.2
N$17: Q6.1 R27.2
N$18: U2.11
N$19: Q4.1 R26.2
N$20: Q7.3 SP2.-
N$21: Q7.1 R28.2
N$22: Q8.1 R37.2
N$23: BT2.+ IC6.14
N$24: D1.K R39.2
N$25: D4.K R40.2
N$26: C33.1 U8.7
N$27: C36.1 U8.5
N$28: C36.2 L2.P$1 U8.3
N$29: C44.1 R42.2 R43.1 U8.8
N$30: U7.11
N$31: U11.11 USB3.3
N$32: U11.12 USB3.2
N$33: Q10.1 R52.2
N$34: Q9.1 R51.2
N$35: Q11.3 SP3.-
N$36: Q11.1 R53.2
N$37: Q12.1 R62.2
N$38: BT3.+ IC10.14
N$39: D5.K R64.2
N$40: D6.K R65.2
N$41: C55.1 U13.7
N$42: C58.1 U13.5
N$43: C58.2 L3.P$1 U13.3
N$44: C66.1 R67.2 R68.1 U13.8
N$45: U12.11
N$46: U16.11 USB4.3
N$47: U16.12 USB4.2
N$48: Q14.1 R77.2
N$49: Q13.1 R76.2
N$50: Q15.3 SP4.-
N$51: Q15.1 R78.2
N$52: Q16.1 R87.2
N$53: BT4.+ IC14.14
N$54: D7.K R89.2
N$55: D8.K R90.2
N$56: C77.1 U18.7
N$57: C80.1 U18.5
N$58: C80.2 L4.P$1 U18.3
N$59: C88.1 R92.2 R93.1 U18.8
N$60: U17.11
PW-EN: C7.1 R16.1 U3.6
PW-EN1: C39.1 R41.1 U8.6
PW-EN2: C61.1 R66.1 U13.6
PW-EN3: C83.1 R91.1 U18.6
RST: J1.15 MCU1.55 Q1.3 S1.1
RST1: J2.15 MCU2.55 Q4.3 S2.1
RST2: J17.15 MCU3.55 Q9.3 S3.1
RST3: J25.15 MCU4.55 Q13.3 S4.1
RTS#: Q1.2 R2.1 U1.2
RTS#1: Q4.2 R27.1 U4.2
RTS#2: Q9.2 R52.1 U11.2
RTS#3: Q13.2 R77.1 U16.2
SPI0_MISO: J10.7 MCU1.27
SPI0_MISO1: J4.7 MCU2.27
SPI0_MISO2: J19.7 MCU3.27
SPI0_MISO3: J27.7 MCU4.27
SPI0_MOSI: J10.3 MCU1.29
SPI0_MOSI1: J4.3 MCU2.29
SPI0_MOSI2: J19.3 MCU3.29
SPI0_MOSI3: J27.3 MCU4.29
SPI0_SCK: J10.5 MCU1.28
SPI0_SCK1: J4.5 MCU2.28
SPI0_SCK2: J19.5 MCU3.28
SPI0_SCK3: J27.5 MCU4.28
SPI0_SS0: J10.2 MCU1.30 R9.1
SPI0_SS1: MCU1.35 TP14.P$1
SPI0_SS2: MCU2.35 TP28.P$1
SPI0_SS3: J4.2 MCU2.30 R32.1
SPI0_SS4: MCU3.35 TP43.P$1
SPI0_SS5: J19.2 MCU3.30 R57.1
SPI0_SS6: MCU4.35 TP58.P$1
SPI0_SS7: J27.2 MCU4.30 R82.1
V_ESP1: C29.1 C31.1 R30.2 R31.2 R35.2 R36.2 U7.2 U10.5
V_ESP2: C51.1 C53.1 R55.2 R56.2 R60.2 R61.2 U12.2 U15.5
V_ESP3: C73.1 C75.1 R80.2 R81.2 R85.2 R86.2 U17.2 U20.5
V_ESP32: C17.1 C19.1 R7.2 R8.2 R12.2 R13.2 U2.2 U6.5
VIN: C2.1 C3.1 C8.1 J8.1 J9.PWR R16.2 U3.2
VIN1: C34.1 C35.1 C40.1 J3.1 J15.PWR R41.2 U8.2
VIN2: C56.1 C57.1 C62.1 J18.1 J23.PWR R66.2 U13.2
VIN3: C78.1 C79.1 C84.1 J26.1 J31.PWR R91.2 U18.2
WIFI_RX_MCU_TX: MCU1.8 R12.1 U2.10
WIFI_RX_MCU_TX1: MCU2.8 R35.1 U7.10
WIFI_RX_MCU_TX2: MCU3.8 R60.1 U12.10
WIFI_RX_MCU_TX3: MCU4.8 R85.1 U17.10
WIFI_TX_MCU_RX: MCU1.7 R13.1 U2.12
WIFI_TX_MCU_RX1: MCU2.7 R36.1 U7.12
WIFI_TX_MCU_RX2: MCU3.7 R61.1 U12.12
WIFI_TX_MCU_RX3: MCU4.7 R86.1 U17.12

## Tracks (layer width: path | path; a pad name or v marks a point on that pad's centre or on a via)
1.8V  (via drill 0.35)
  Top 0.406: MCU1.53 v55.12,29.72 | v41.66,41.66 v39.62,41.66
  Bottom 0.203: 60.2,23.75 60.13,23.69
  Bottom 0.305: U5.10 42.79,41.66 | 42.79,41.66 47.62,41.66 48.01,41.28 48.01,40.13 U5.2 | v41.66,41.66 42.79,41.66
  Bottom 0.406: v55.12,29.72 55.12,26.92 56.13,25.91 59.05,25.91 60.2,24.77 60.2,23.75 | 60.13,23.69 59.05,22.61 50.29,22.61 48.9,24 48.9,31.37 48.01,32.26 40.39,32.26 39.62,33.02 v39.62,41.66
1.8V1  (via drill 0.35)
  Top 0.406: MCU2.53 v162.18,29.72 | v148.72,41.66 v146.69,41.66
  Bottom 0.203: 167.26,23.75 167.19,23.69
  Bottom 0.305: U9.10 149.86,41.66 | 149.86,41.66 154.69,41.66 155.07,41.28 155.07,40.13 U9.2 | v148.72,41.66 149.86,41.66
  Bottom 0.406: v162.18,29.72 162.18,26.92 163.19,25.91 166.12,25.91 167.26,24.77 167.26,23.75 | 167.19,23.69 166.12,22.61 157.35,22.61 155.96,24 155.96,31.37 155.07,32.26 147.45,32.26 146.69,33.02 v146.69,41.66
1.8V2  (via drill 0.35)
  Top 0.406: MCU3.53 v55.12,105.92 | v41.66,117.86 v39.62,117.86
  Bottom 0.203: 60.2,99.95 60.13,99.88
  Bottom 0.305: U14.10 42.79,117.86 | 42.79,117.86 47.62,117.86 48.01,117.47 48.01,116.33 U14.2 | v41.66,117.86 42.79,117.86
  Bottom 0.406: v55.12,105.92 55.12,103.12 56.13,102.11 59.05,102.11 60.2,100.96 60.2,99.95 | 60.13,99.88 59.05,98.81 50.29,98.81 48.9,100.2 48.9,107.57 48.01,108.46 40.39,108.46 39.62,109.22 v39.62,117.86
1.8V3  (via drill 0.35)
  Top 0.406: MCU4.53 v162.18,105.92 | v148.72,117.86 v146.69,117.86
  Bottom 0.203: 167.26,99.95 167.19,99.88
  Bottom 0.305: U19.10 149.86,117.86 | 149.86,117.86 154.69,117.86 155.07,117.47 155.07,116.33 U19.2 | v148.72,117.86 149.86,117.86
  Bottom 0.406: v162.18,105.92 162.18,103.12 163.19,102.11 166.12,102.11 167.26,100.96 167.26,99.95 | 167.19,99.88 166.12,98.81 157.35,98.81 155.96,100.2 155.96,107.57 155.07,108.46 147.45,108.46 146.69,109.22 v146.69,117.86
+3V1  (via drill 0.35)
  Top 0.305: C28.1 125.77,38.77 126.49,39.5 v127,39.5 | v127,42.67 128.75,42.67 129.16,43.08 IC8.14 129.16,45.47 130.43,46.74 C43.1
  Top 0.406: v144.78,71.88 143,70.1 141.73,70.1 | U4.14 136.46,70.8 v137.16,70.1 | v137.16,70.1 141.73,70.1 | U4.3 133.92,70.04 v133.98,70.1 | J2.14 121.67,49.02 v127.89,55.25 | U4.13 137.1,70.17 v137.16,70.1 | C24.1 141.73,70.1 | C25.1 117.73,13.5 117.73,15.62 J2.40 119.38,16 120.4,17.02 120.4,20.19 122.05,21.84 122.05,32.89 123.44,34.29 IC6.2 123.48,34.29 123.48,36.45 124.5,37.47 C28.1 | R34.2 R33.2 201.72,64.94 202.44,65.66 202.44,71.84 U$1.4 | v152.53,23.5 152.49,23.53 J4.4 152.49,27.81 C26.1 R32.2 | IC5.8 174.5,49.78 173.82,49.11 C27.1 169.08,49.11 v169.04,49.15 | v162.81,17.27 162.81,14.22 163.58,13.46 171.5,13.46 174.3,16.26 SP2.+ | v162.31,49.15 v155.07,49.15
  Top 0.813: MCU2.54 v163.45,29.72 v163.45,28.7
  Bottom 0.203: 202.31,48.01 197.61,48.01 | 155.07,46.26 U9.19
  Bottom 0.305: v127,42.67 v127,39.5 | v155.07,49.15 155.07,46.26
  Bottom 0.406: v137.16,70.1 v133.98,70.1 129.79,70.1 127.89,68.2 v127.89,55.25 | v152.53,23.5 154.3,23.5 156.46,21.34 156.46,17.27 | v169.04,49.15 v162.31,49.15 | R47.2 182.63,50.42 182.5,50.55 | R46.2 182.5,48.51 | R45.2 182.5,46.61 | R44.2 182.5,44.7 | 169.29,30.86 196.34,30.86 197.61,32.13 197.61,41.53 198.29,42.2 C42.1 198.25,43.22 198.25,44.83 | IC7.8 198.25,44.83 | 198.25,44.83 197.61,45.47 197.61,48.01 | 202.31,48.01 202.73,48.01 203.49,47.24 R48.2 | J16.1 145.8,67.69 144.78,68.71 v144.78,71.88
  Bottom 1.016: v163.45,28.7 v163.45,29.72 163.45,30.86 | 162.31,51.82 162.31,63.88 | 162.31,51.82 v162.31,49.15 162.31,30.86 163.45,30.86 | 162.31,63.88 171.2,72.77 192.53,72.77 194.44,74.68 201.42,74.68 202.4,73.7 U$1.4 | 163.45,30.86 169.29,30.86 169.29,19.05 167.51,17.27 v162.81,17.27 156.46,17.27 142.37,17.27 141.1,16 J2.40 | 162.31,51.82 181.23,51.82 182.5,50.55 182.5,48.51 182.5,46.61 182.5,44.7 J14.10 J14.12 | 162.31,63.88 161.04,65.15 152.4,65.15 151.38,66.17 J16.1
+3V2  (via drill 0.35)
  Top 0.305: C50.1 18.71,114.97 19.43,115.7 v19.94,115.7 | v19.94,118.87 21.69,118.87 22.1,119.28 IC12.14 22.1,121.67 23.37,122.94 C65.1
  Top 0.406: v37.72,148.08 35.94,146.3 34.67,146.3 | U11.14 29.4,147 v30.1,146.3 | v30.1,146.3 34.67,146.3 | U11.3 26.86,146.24 v26.92,146.3 | J17.14 14.6,125.22 v20.83,131.45 | U11.13 30.03,146.37 v30.1,146.3 | C46.1 34.67,146.3 | C47.1 10.67,89.7 10.67,91.82 J17.40 12.32,92.2 13.34,93.22 13.34,96.39 14.99,98.04 14.99,109.09 16.38,110.49 IC10.2 16.42,110.49 16.42,112.65 17.44,113.66 C50.1 | R59.2 R58.2 94.65,141.14 95.38,141.86 95.38,148.04 U$3.4 | v45.47,99.69 45.43,99.73 J19.4 45.43,104.01 C48.1 R57.2 | IC9.8 67.44,125.98 66.76,125.31 C49.1 62.01,125.31 v61.98,125.35 | v55.75,93.47 55.75,90.42 56.51,89.66 64.44,89.66 67.24,92.46 SP3.+ | v55.24,125.35 v48.01,125.35
  Top 0.813: MCU3.54 v56.39,105.92 v56.39,104.9
  Bottom 0.203: 95.25,124.21 90.55,124.21 | 48.01,122.46 U14.19
  Bottom 0.305: v19.94,118.87 v19.94,115.7 | v48.01,125.35 48.01,122.46
  Bottom 0.406: v30.1,146.3 v26.92,146.3 22.73,146.3 20.83,144.4 v20.83,131.45 | v45.47,99.69 47.24,99.69 49.4,97.54 49.4,93.47 | v61.98,125.35 v55.24,125.35 | R72.2 75.56,126.62 75.44,126.75 | R71.2 75.44,124.71 | R70.2 75.44,122.81 | R69.2 75.44,120.9 | 62.23,107.06 89.28,107.06 90.55,108.33 90.55,117.73 91.22,118.4 C64.1 91.19,119.42 91.19,121.03 | IC11.8 91.19,121.03 | 91.19,121.03 90.55,121.67 90.55,124.21 | 95.25,124.21 95.67,124.21 96.43,123.44 R73.2 | J24.1 38.74,143.89 37.72,144.91 v37.72,148.08
  Bottom 1.016: v56.39,104.9 v56.39,105.92 56.39,107.06 | 55.24,128.02 55.24,140.08 | 55.24,128.02 v55.24,125.35 55.24,107.06 56.39,107.06 | 55.24,140.08 64.13,148.97 85.47,148.97 87.38,150.88 94.36,150.88 95.34,149.9 U$3.4 | 56.39,107.06 62.23,107.06 62.23,95.25 60.45,93.47 v55.75,93.47 49.4,93.47 35.31,93.47 34.04,92.2 J17.40 | 55.24,128.02 74.17,128.02 75.44,126.75 75.44,124.71 75.44,122.81 75.44,120.9 J22.10 J22.12 | 55.24,140.08 53.98,141.35 45.34,141.35 44.32,142.37 J24.1
+3V3  (via drill 0.35)
  Top 0.305: C16.1 18.71,38.77 19.43,39.5 v19.94,39.5 | v19.94,42.67 21.69,42.67 22.1,43.08 IC4.14 22.1,45.47 23.37,46.74 C21.1
  Top 0.406: v37.72,71.88 35.94,70.1 34.67,70.1 | U1.14 29.4,70.8 v30.1,70.1 | v30.1,70.1 34.67,70.1 | U1.3 26.86,70.04 v26.92,70.1 | J1.14 14.6,49.02 v20.83,55.25 | U1.13 30.03,70.17 v30.1,70.1 | C10.1 34.67,70.1 | C11.1 10.67,13.5 10.67,15.62 J1.40 12.32,16 13.34,17.02 13.34,20.19 14.99,21.84 14.99,32.89 16.38,34.29 IC3.2 16.42,34.29 16.42,36.45 17.44,37.47 C16.1 | R11.2 R10.2 94.65,64.94 95.38,65.66 95.38,71.84 U$2.4 | v45.47,23.5 45.43,23.53 J10.4 45.43,27.81 C14.1 R9.2 | IC1.8 67.44,49.78 66.76,49.11 C15.1 62.01,49.11 v61.98,49.15 | v55.75,17.27 55.75,14.22 56.51,13.46 64.44,13.46 67.24,16.26 SP1.+ | v55.24,49.15 v48.01,49.15
  Top 0.813: MCU1.54 v56.39,29.72 v56.39,28.7
  Bottom 0.203: 95.25,48.01 90.55,48.01 | 48.01,46.26 U5.19
  Bottom 0.305: v19.94,42.67 v19.94,39.5 | v48.01,49.15 48.01,46.26
  Bottom 0.406: v30.1,70.1 v26.92,70.1 22.73,70.1 20.83,68.2 v20.83,55.25 | v45.47,23.5 47.24,23.5 49.4,21.34 49.4,17.27 | v61.98,49.15 v55.24,49.15 | R22.2 75.56,50.42 75.44,50.55 | R21.2 75.44,48.51 | R20.2 75.44,46.61 | R19.2 75.44,44.7 | 62.23,30.86 89.28,30.86 90.55,32.13 90.55,41.53 91.22,42.2 C13.1 91.19,43.22 91.19,44.83 | IC2.8 91.19,44.83 | 91.19,44.83 90.55,45.47 90.55,48.01 | 95.25,48.01 95.67,48.01 96.43,47.24 R23.2 | J11.1 38.74,67.69 37.72,68.71 v37.72,71.88
  Bottom 1.016: v56.39,28.7 v56.39,29.72 56.39,30.86 | 55.24,51.82 55.24,63.88 | 55.24,51.82 v55.24,49.15 55.24,30.86 56.39,30.86 | 55.24,63.88 64.13,72.77 85.47,72.77 87.38,74.68 94.36,74.68 95.34,73.7 U$2.4 | 56.39,30.86 62.23,30.86 62.23,19.05 60.45,17.27 v55.75,17.27 49.4,17.27 35.31,17.27 34.04,16 J1.40 | 55.24,51.82 74.17,51.82 75.44,50.55 75.44,48.51 75.44,46.61 75.44,44.7 J7.10 J7.12 | 55.24,63.88 53.98,65.15 45.34,65.15 44.32,66.17 J11.1
+3V4  (via drill 0.35)
  Top 0.305: C72.1 125.77,114.97 126.49,115.7 v127,115.7 | v127,118.87 128.75,118.87 129.16,119.28 IC16.14 129.16,121.67 130.43,122.94 C87.1
  Top 0.406: v144.78,148.08 143,146.3 141.73,146.3 | U16.14 136.46,147 v137.16,146.3 | v137.16,146.3 141.73,146.3 | U16.3 133.92,146.24 v133.98,146.3 | J25.14 121.67,125.22 v127.89,131.45 | U16.13 137.1,146.37 v137.16,146.3 | C68.1 141.73,146.3 | C69.1 117.73,89.7 117.73,91.82 J25.40 119.38,92.2 120.4,93.22 120.4,96.39 122.05,98.04 122.05,109.09 123.44,110.49 IC14.2 123.48,110.49 123.48,112.65 124.5,113.66 C72.1 | R84.2 R83.2 201.72,141.14 202.44,141.86 202.44,148.04 U$4.4 | v152.53,99.69 152.49,99.73 J27.4 152.49,104.01 C70.1 R82.2 | IC13.8 174.5,125.98 173.82,125.31 C71.1 169.08,125.31 v169.04,125.35 | v162.81,93.47 162.81,90.42 163.58,89.66 171.5,89.66 174.3,92.46 SP4.+ | v162.31,125.35 v155.07,125.35
  Top 0.813: MCU4.54 v163.45,105.92 v163.45,104.9
  Bottom 0.203: 202.31,124.21 197.61,124.21 | 155.07,122.46 U19.19
  Bottom 0.305: v127,118.87 v127,115.7 | v155.07,125.35 155.07,122.46
  Bottom 0.406: v137.16,146.3 v133.98,146.3 129.79,146.3 127.89,144.4 v127.89,131.45 | v152.53,99.69 154.3,99.69 156.46,97.54 156.46,93.47 | v169.04,125.35 v162.31,125.35 | R97.2 182.63,126.62 182.5,126.75 | R96.2 182.5,124.71 | R95.2 182.5,122.81 | R94.2 182.5,120.9 | 169.29,107.06 196.34,107.06 197.61,108.33 197.61,117.73 198.29,118.4 C86.1 198.25,119.42 198.25,121.03 | IC15.8 198.25,121.03 | 198.25,121.03 197.61,121.67 197.61,124.21 | 202.31,124.21 202.73,124.21 203.49,123.44 R98.2 | J32.1 145.8,143.89 144.78,144.91 v144.78,148.08